# Allegro board AD201MPCHVVA_VER_A_Allegro.brd
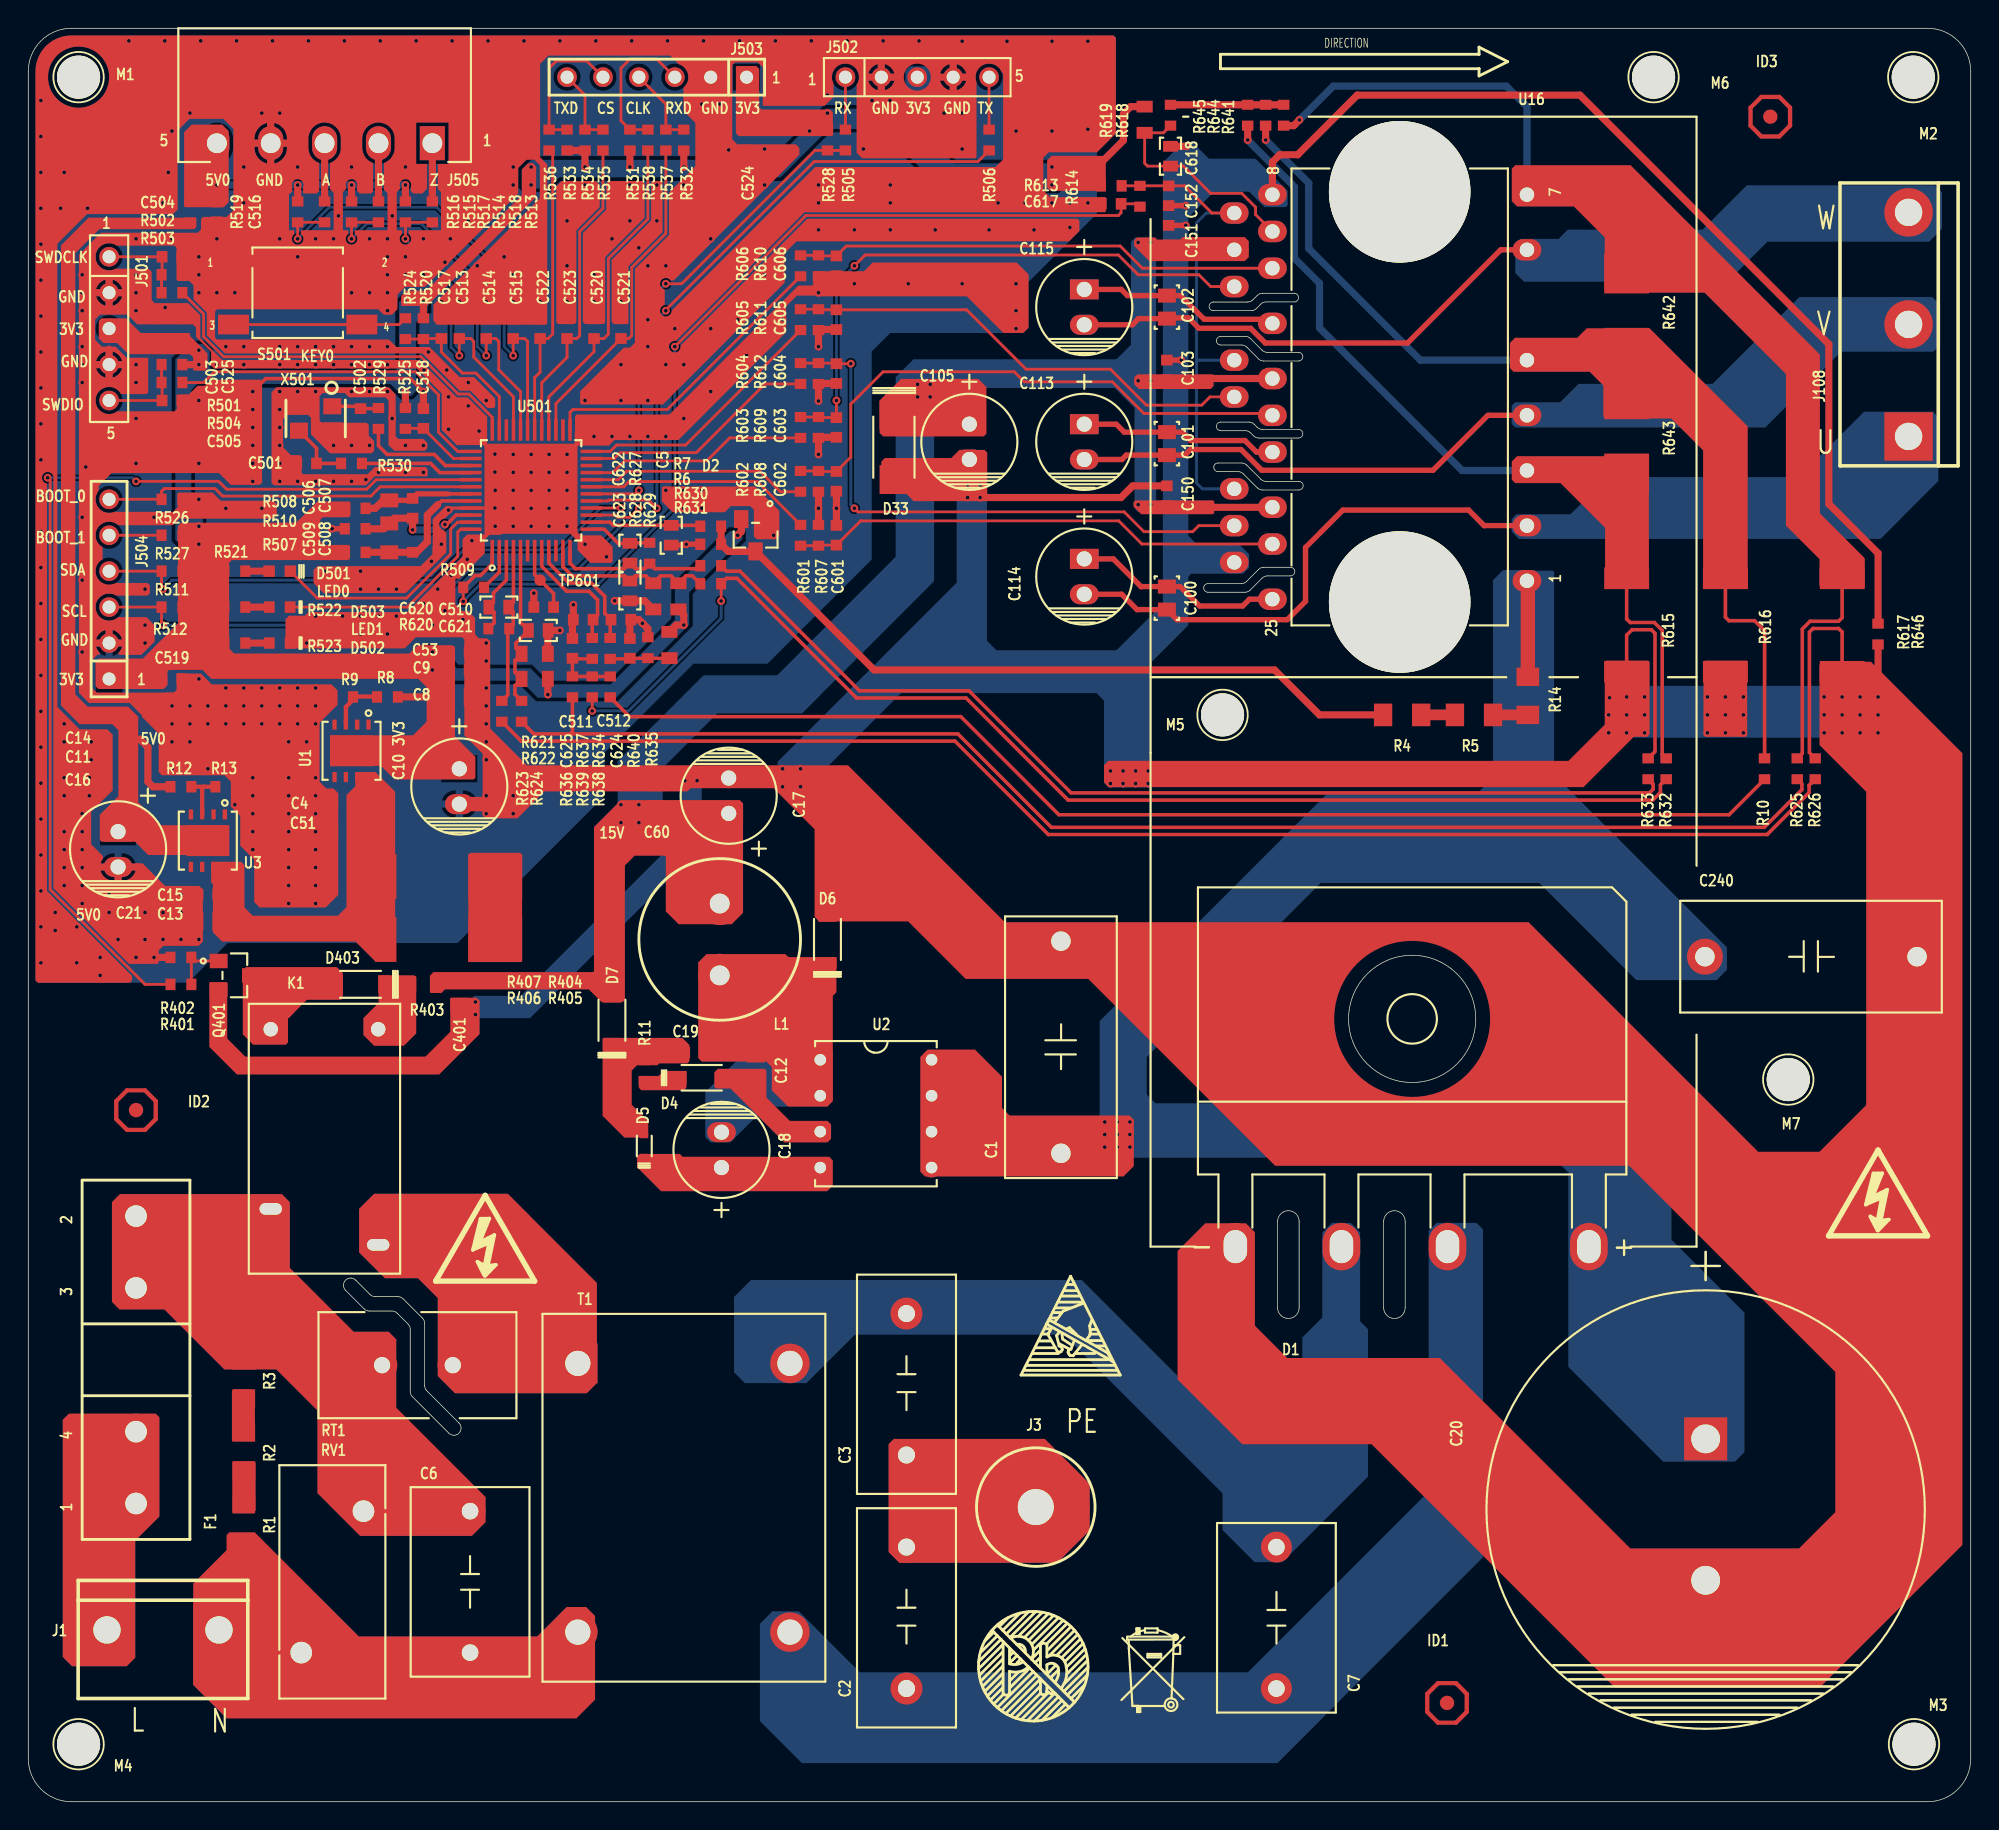
[diagram p0: board, top side]
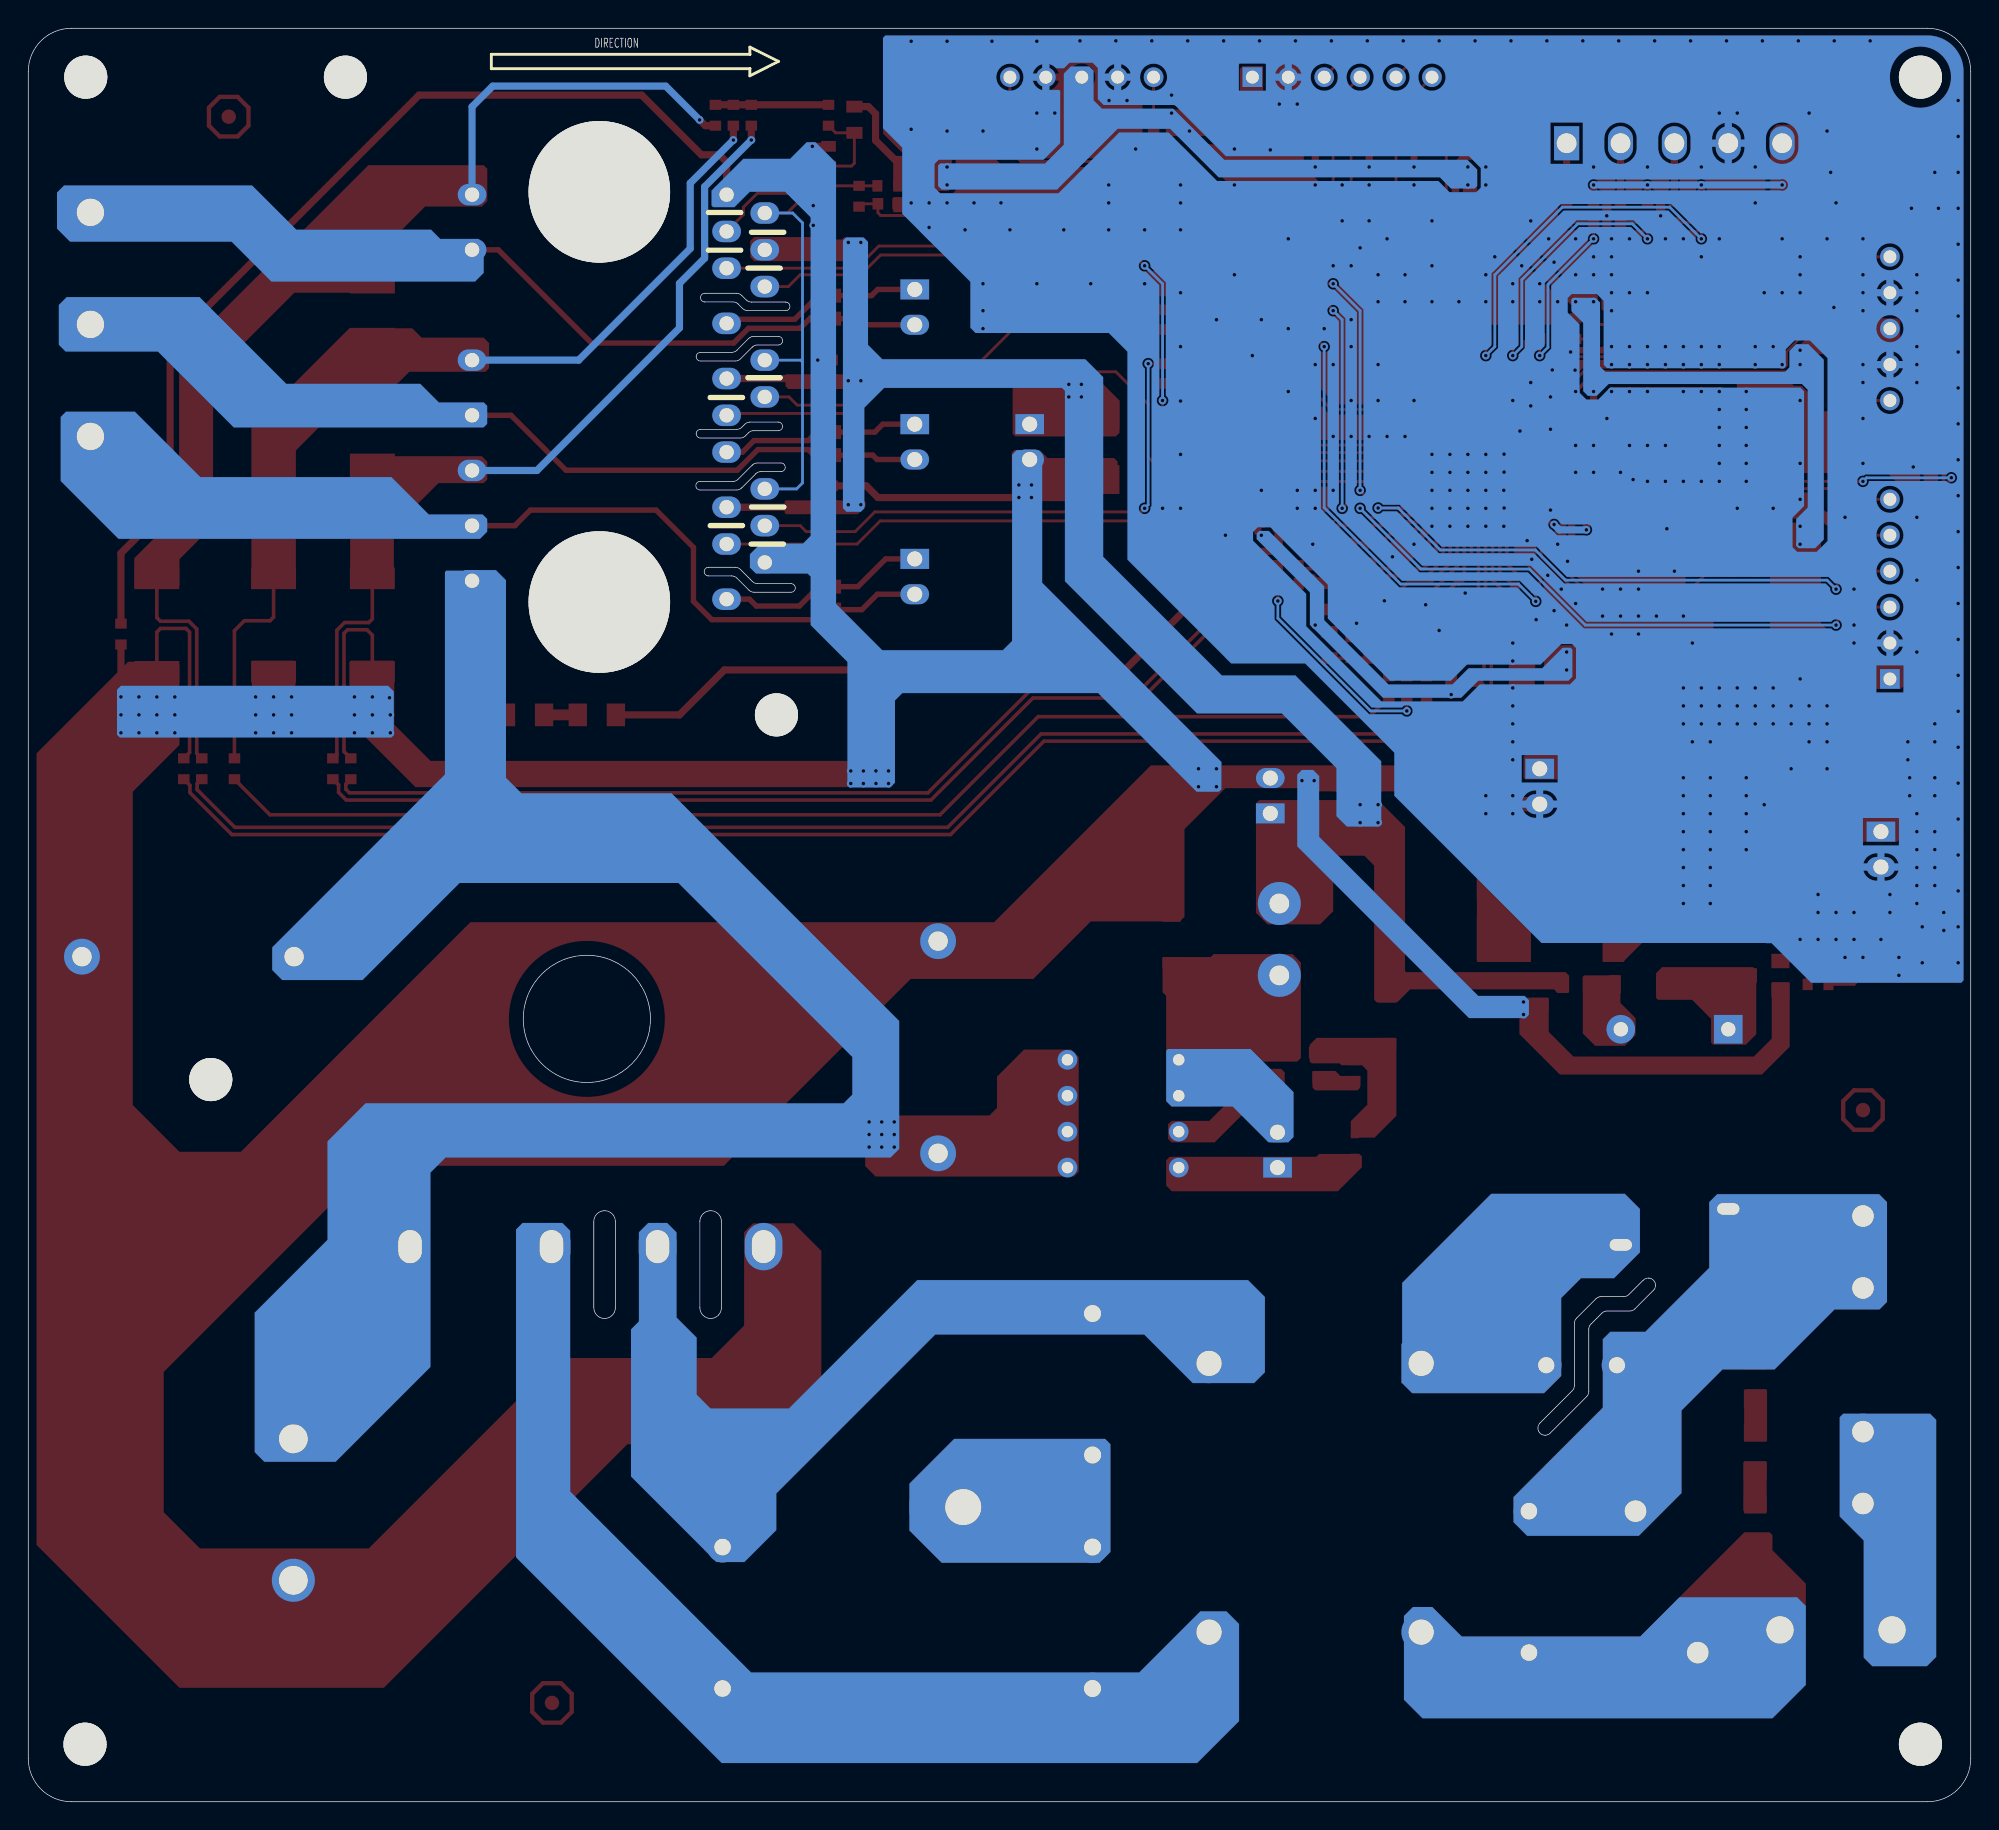
[diagram p1: board, bottom side, seen from below]

Outline 137.36 x 125.37 mm; copper layers: TOP, BOTTOM. Coordinates in mm from the lower left corner of the outline.
Outline path: circle c97.86,55.34 r4.5 ; 0,122.33 arc(0.89,124.48) 3.05,125.37 134.32,125.37 arc(136.47,124.48) 137.36,122.33 137.36,3.05 arc(136.47,0.89) 134.32,0 3.05,0 arc(0.89,0.89) 0,3.05 0,122.33 ; 22.29,36.51 arc(22.44,36.87) 22.8,37.02 arc(22.99,36.98) 23.16,36.87 24.17,35.85 arc(24.34,35.74) 24.53,35.71 26.14,35.71 arc(26.34,35.67) 26.5,35.56 27.88,34.18 arc(27.99,34.02) 28.03,33.82 28.03,29.42 arc(28.07,29.22) 28.18,29.06 30.46,26.78 arc(30.57,26.61) 30.61,26.42 arc(30.46,26.06) 30.1,25.91 arc(29.9,25.95) 29.74,26.06 27.16,28.64 arc(27.05,28.8) 27.01,29 27.01,33.4 arc(26.97,33.6) 26.86,33.76 26.08,34.54 arc(25.92,34.65) 25.72,34.69 24.11,34.69 arc(23.92,34.73) 23.75,34.84 22.44,36.15 arc(22.33,36.32) 22.29,36.51 ; 83.43,85.51 arc(83.12,85.81) 83.43,86.12 85.79,86.12 arc(85.99,86.15) 86.15,86.26 87.01,87.12 arc(87.17,87.23) 87.37,87.27 89.26,87.27 arc(89.56,86.96) 89.26,86.66 87.62,86.66 arc(87.42,86.62) 87.26,86.51 86.4,85.66 arc(86.24,85.54) 86.04,85.51 83.43,85.51 ; 83.81,105.41 arc(83.5,105.72) 83.81,106.02 86.23,106.02 arc(86.43,106.06) 86.59,106.17 86.91,106.49 arc(87.07,106.6) 87.27,106.64 89.52,106.64 arc(89.83,106.33) 89.52,106.03 87.52,106.03 arc(87.33,105.99) 87.16,105.88 86.84,105.56 arc(86.68,105.45) 86.48,105.41 83.81,105.41 ; 84.02,103.29 arc(84.11,103.5) 84.33,103.59 86.06,103.59 arc(86.25,103.56) 86.42,103.45 87.25,102.61 arc(87.42,102.5) 87.61,102.46 89.83,102.46 arc(90.04,102.37) 90.13,102.16 arc(90.04,101.94) 89.83,101.85 87.36,101.85 arc(87.16,101.89) 87,102 86.17,102.84 arc(86,102.95) 85.81,102.98 84.33,102.98 arc(84.11,103.07) 84.02,103.29 ; 84.02,97.23 arc(84.11,97.45) 84.33,97.54 86.33,97.54 arc(86.52,97.5) 86.69,97.39 86.91,97.17 arc(87.07,97.06) 87.26,97.02 89.83,97.02 arc(90.04,96.93) 90.13,96.71 arc(90.04,96.5) 89.83,96.41 87.01,96.41 arc(86.82,96.45) 86.65,96.56 86.43,96.78 arc(86.27,96.89) 86.07,96.93 84.33,96.93 arc(84.11,97.02) 84.02,97.23 ; 84.14,94.03 arc(83.83,94.34) 84.14,94.64 85.81,94.64 arc(86,94.6) 86.17,94.49 87.17,93.49 arc(87.33,93.38) 87.53,93.34 89.85,93.34 arc(90.16,93.04) 89.85,92.73 87.27,92.73 arc(87.08,92.77) 86.91,92.88 85.91,93.88 arc(85.75,93.99) 85.55,94.03 84.14,94.03 ; 88.35,41.02 arc(89.11,41.78) 89.87,41.02 89.87,34.92 arc(89.11,34.16) 88.35,34.92 88.35,41.02 ; 95.85,41.02 arc(96.61,41.78) 97.37,41.02 97.37,34.92 arc(96.61,34.16) 95.85,34.92 95.85,41.02

## Design rules (mm)
net group IPM_W: nets IPM_W VB_W_C
net group 3W: nets APT0_A APT0_B APT1_A APT1_B APT2_B
net group GND: nets GND

## Placement (name value [footprint] x y rotation side)
C1  100nF  [CAP2-591X]  73.03 45.84 90 top
C2  4.7nF  [CAP2-394L]  62.1 8 90 top
C3  4.7nF  [CAP2-394L]  62.1 24.51 90 top
C4  100nF  [SC0603-TC]  22.23 70.48 180 top
C5  1nF  [SC0603-PA]  45.47 89.53 270 top
C6  220nF  [CAP2-394M]  31.24 10.54 90 top
C7  220nF  [CAP2-394M]  88.27 8 90 top
C8  10uF  [SC0805-TD]  30.48 78.11 180 top
C9  100nF  [SC0603-TC]  30.48 80.01 180 top
C10  100uF  [CAPC2-98-248A]  30.48 73.03 270 top
C11  100nF  [SC0603-TC]  6.2 73.84 0 top
C12  22nF  [SC0805-TD]  51.44 51.94 270 top
C13  10uF  [SC0805-TD]  12.7 62.23 180 top
C14  100nF  [SC0603-TC]  6.2 75.11 0 top
C15  100nF  [SC0603-TC]  12.7 64.14 180 top
C16  10uF  [SC0805-TD]  6.17 72.21 0 top
C17  100uF  [CAPC2-98-248A]  49.53 69.87 90 top
C18  10uF  [CAPC2-98-248A]  49.02 44.83 90 top
C19  100nF  [SC0603-TC]  47.12 52.96 180 top
C20  470uF  [CAPC2-394-1181A]  118.62 25.65 270 top
C21  100uF  [CAPC2-98-248A]  6.35 68.58 270 top
C51  10uF  [SC0805-TD]  22.23 68.58 180 top
C53  100nF  [SC0603-TC]  30.48 81.28 180 top
C60  10uF  [SC0805-TD]  44.45 71.12 90 top
C100  100nF  [SC0805B]  80.52 85.09 270 top
C101  100nF  [SC0805B]  80.52 96.01 270 top
C102  100nF  [SC0805B]  80.52 105.66 270 top
C103  100nF  [SC0603-TC]  80.52 101.22 270 top
C105  100uF  [CAPC2-98-248A]  66.55 97.39 270 top
C113  10uF  [CAPC2-98-248A]  74.68 97.39 270 top
C114  10uF  [CAPC2-98-248A]  74.68 87.86 270 top
C115  10uF  [CAPC2-98-248A]  74.68 106.91 270 top
C150  100nF  [SC0603-TC]  80.52 92.33 270 top
C151  100nF  [SC0603-TC]  80.64 110.74 270 top
C152  10nF/NC  [SC0603-TC]  80.64 113.54 90 top
C240  100nF/NC  [CAP2-591X]  118.57 59.74 0 top
C401  10uF  [SC0805-TD]  30.48 57.15 270 top
C501  18pF  [SC0603-TB]  19.68 94.61 0 top
C502  18pF  [SC0603-TB]  23.5 97.79 90 top
C503  100nF  [SC0603-TC]  8.89 104.14 90 top
C504  18pF  [SC0603-TB]  10.16 109.22 180 top
C505  18pF  [SC0603-TB]  10.16 99.06 180 top
C506  10uF  [SC0805-TD]  25.53 91.19 270 top
C507  100nF  [SC0603-TC]  27.18 91.44 270 top
C508  100nF  [SC0603-TC]  27.18 87.63 270 top
C509  10uF  [SC0805-TD]  25.53 87.52 270 top
C510  100pF  [SC0603-TC]  36.45 84.45 0 top
C511  100pF  [SC0603-TC]  39.24 83.57 0 top
C512  100pF  [SC0603-TC]  41.91 83.57 180 top
C513  100pF  [SC0603-TC]  30.48 104.14 90 top
C514  100pF  [SC0603-TC]  32.38 104.14 90 top
C515  100pF  [SC0603-TC]  34.29 104.14 90 top
C516  100nF  [SC0603-TC]  13.34 112.39 90 top
C517  100nF  [SC0603-TC]  29.21 104.14 90 top
C518  100nF  [SC0603-TC]  27.94 97.79 90 top
C519  100nF  [SC0603-TC]  10.16 79.38 0 top
C520  100pF  [SC0603-TC]  40.01 104.14 90 top
C521  100pF  [SC0603-TC]  41.91 104.14 90 top
C522  100pF  [SC0603-TC]  36.2 104.14 90 top
C523  100pF  [SC0603-TC]  38.1 104.14 90 top
C524  100nF  [SC0603-TC]  50.8 117.47 90 top
C525  10uF  [SC0805-TD]  10.79 104.14 90 top
C601  100pF  [SC0603-TC]  57.15 89.53 90 top
C602  100pF  [SC0603-TC]  57.15 93.34 270 top
C603  100pF  [SC0603-TC]  57.15 97.16 270 top
C604  100pF  [SC0603-TC]  57.15 100.97 270 top
C605  100pF  [SC0603-TC]  57.15 104.78 270 top
C606  100pF  [SC0603-TC]  57.15 108.58 270 top
C617  10nF  [SC0603-TC]  76.58 112.97 0 top
C618  1nF  [SC0603-PA]  80.77 116.33 90 top
C620  47pF  [SC0603-PA]  33.27 84.45 180 top
C621  47pF  [SC0603-PA]  36.07 82.8 180 top
C622  47pF  [SC0603-PA]  42.55 88.27 90 top
C623  47pF  [SC0603-PA]  42.55 85.6 90 top
C624  100pF  [SC0603-TC]  42.55 81.53 90 top
C625  100pF  [SC0603-TC]  38.48 81.53 90 top
D1  BRIDGE4  [DIODE4-295-65-DOWN-BACK]  110.36 39.24 180 top
D2  D2-3_A  [SOT23]  51.44 89.53 180 top
D4  DZ_A  [HSOD123A]  47.62 51.18 180 top
D5  D_A  [SD0503A]  43.56 46.35 270 top
D6  D_A  [SD1107H]  56.52 60.96 270 top
D7  D_A  [SD1107H]  41.27 55.24 270 top
D33  1N5231BRL  [SD1714C]  61.21 95.76 90 top
D403  D_A  [SD1107H]  23.5 57.78 0 top
D501  LED  [SD0603-LED-A]  17.78 87 0 top
D502  LED  [HSD0603-LED]  17.78 81.92 0 top
D503  LED  [HSD0603-LED]  17.78 84.45 0 top
F1  FUSE-SMD5A  [FUSE4-200A]  7.62 31.24 90 top
ID1  PCB-MARKPOINT  [ID-BOARD]  100.33 6.99 0 top
ID2  PCB-MARKPOINT  [ID-BOARD]  7.62 48.9 0 top
ID3  PCB-MARKPOINT  [ID-BOARD]  123.19 119.13 0 top
J1  SIP2  [SIP-2P-312]  9.53 12.14 180 top
J3  *  [PWC0101-M-A]  71.25 20.83 0 top
J108  *  [SIP-3P-312]  132.97 96.52 90 top
J501  WH254-05-230_126-G-S  [SIP-5P]  5.71 109.22 270 top
J502  WH254-05-230_126-G-S  [SIP-5P]  57.78 121.92 0 top
J503  WH254-06-230_126-G-S  [SIP-6P]  44.45 121.92 180 top
J504  WH254-06-230_126-G-S  [SIP-6P]  5.71 85.72 90 top
J505  NC  [TB5-150S-C]  28.57 117.25 180 top
K1  HF32FV-G_12-HSLTF  [RLY4-500-299B]  17.14 54.61 270 top
L1  1.5mH  [INDC2-200]  48.9 60.96 90 top
M1  1381028_none  [HOLE120]  3.56 121.92 0 top
M2  1381028_none  [HOLE120]  133.3 121.92 0 top
M3  1381028_none  [HOLE120]  133.35 4.06 0 top
M4  1381028_none  [HOLE120]  3.56 4.06 0 top
M5  1381028_none  [HOLE120]  84.45 76.83 0 top
M6  1381028_none  [HOLE120]  114.94 121.92 0 top
M7  1381028_none  [HOLE120]  124.46 51.05 0 top
NOREF  -  []  96.66 34.16 0 top
NOREF#2  -  []  94.46 123.03 0 top
NOREF#3  -  []  73.03 33.16 0 top
NOREF#4  -  []  32.31 36.8 0 top
NOREF#5  -  []  90.12 102.08 0 top
NOREF#6  -  []  89.77 106.16 0 top
NOREF#7  -  []  0 80.72 0 top
NOREF#8  -  []  90.06 96.52 0 top
NOREF#9  -  []  90.15 92.96 0 top
NOREF#10  -  []  55.64 0 90 top
NOREF#11  -  []  30.31 25.95 0 top
NOREF#12  -  []  89.55 86.87 0 top
NOREF#13  -  []  71.07 9.58 0 top
NOREF#14  -  []  130.81 40.01 0 top
NOREF#15  -  []  99.62 51.2 0 top
NOREF#16  -  []  89.59 34.34 0 top
NOREF#17  -  []  82.07 9.41 0 top
Q401  NPN-BEC  [SOT23]  14.61 58.42 270 top
R1  200k  [SR1206-TD]  15.24 19.68 90 top
R2  200k  [SR1206-TD]  15.24 24.77 90 top
R3  200k  [SR1206-TD]  15.24 29.84 90 top
R4  475k  [SR1206-TD]  97.16 76.83 180 top
R5  475k  [SR1206-TD]  102.23 76.83 180 top
R6  12k  [SR0603-TB]  48.26 88.9 0 top
R7  499  [SR0603-TB]  48.26 90.17 180 top
R8  300  [SR0603-TB]  25.4 78.11 0 top
R9  499  [SR0603-TB]  22.23 78.11 0 top
R10  0  [SR0603-TB]  122.78 73.03 270 top
R11  1.74k  [SR0603-TB]  43.56 51.69 90 top
R12  100  [SR0603-TB]  10.79 71.75 180 top
R13  300  [SR0603-TB]  13.97 71.75 180 top
R14  475k  [SR1206-TD]  106.05 78.18 270 top
R401  4.7k  [SR0603-TB]  10.79 57.78 180 top
R402  10k  [SR0603-TB]  10.79 59.69 0 top
R403  200  [SR0805-TB]  27.94 57.78 180 top
R404  8.2  [SR2512-TE]  37.47 65.41 180 top
R405  8.2  [SR2512-TE]  37.47 60.96 180 top
R406  8.2  [SR2512-TE]  28.57 60.96 180 top
R407  8.2  [SR2512-TE]  28.57 65.41 180 top
R501  4.7k  [SR0603-TB]  10.16 101.6 0 top
R502  1k  [SR0603-TB]  10.16 107.95 180 top
R503  100  [SR0603-TB]  10.16 106.68 180 top
R504  100  [SR0603-TB]  10.16 100.33 180 top
R505  100  [SR0603-TB]  57.78 117.47 270 top
R506  100  [SR0603-TB]  67.94 117.47 270 top
R507  0  [SR0603-TB]  23.11 88.33 0 top
R508  0  [SR0603-TB]  23.11 91.44 0 top
R509  0  [SR0603-TB]  31.5 85.85 180 top
R510  0  [SR0603-TB]  23.11 89.99 0 top
R511  4.7k  [SR0603-TB]  10.16 87 0 top
R512  4.7k  [SR0603-TB]  10.16 84.45 0 top
R513  33  [SR0603-TB]  28.57 112.39 90 top
R514  33  [SR0603-TB]  24.77 112.39 90 top
R515  33  [SR0603-TB]  20.95 112.39 90 top
R516  10k  [SR0603-TB]  19.05 112.39 90 top
R517  10k  [SR0603-TB]  22.86 112.39 90 top
R518  10k  [SR0603-TB]  26.67 112.39 90 top
R519  0  [SR0603-TB]  11.43 112.39 270 top
R520  10k  [SR0603]  27.94 104.14 90 top
R521  300  [SR0603-TB]  14.61 87 180 top
R522  300  [SR0603-TB]  14.61 84.45 180 top
R523  300  [SR0603-TB]  14.61 81.92 180 top
R524  100  [SR0603-TB]  26.67 104.14 270 top
R525  10k  [SR0603-TB]  26.67 97.79 90 top
R526  10k  [SR0603-TB]  10.16 92.08 0 top
R527  1k  [SR0603-TB]  10.16 89.53 180 top
R528  4.7k  [SR0603-TB]  56.52 117.47 90 top
R529  0*  [SR0603-TB]  24.77 97.79 270 top
R530  0*  [SR0603-TB]  22.86 94.61 0 top
R531  10k  [SR0603-TB]  42.55 117.47 270 top
R532  10k  [SR0603-TB]  46.35 117.47 270 top
R533  10k  [SR0603-TB]  38.1 117.47 270 top
R534  10k  [SR0603-TB]  39.37 117.47 270 top
R535  33  [SR0603-TB]  40.64 117.47 90 top
R536  33  [SR0603-TB]  36.83 117.47 90 top
R537  33  [SR0603-TB]  45.09 117.47 90 top
R538  33  [SR0603-TB]  43.81 117.47 90 top
R601  100  [SR0603-TB]  54.61 89.53 270 top
R602  100  [SR0603-TB]  54.61 93.34 90 top
R603  100  [SR0603-TB]  54.61 97.16 90 top
R604  100  [SR0603-TB]  54.61 100.97 90 top
R605  100  [SR0603-TB]  54.61 104.78 90 top
R606  100  [SR0603-TB]  54.61 108.58 90 top
R607  4.7k  [SR0603-TB]  55.88 89.53 270 top
R608  4.7k  [SR0603-TB]  55.88 93.34 90 top
R609  4.7k  [SR0603-TB]  55.88 97.16 90 top
R610  4.7k  [SR0603-TB]  55.88 108.58 90 top
R611  4.7k  [SR0603-TB]  55.88 104.78 90 top
R612  4.7k  [SR0603-TB]  55.88 100.97 90 top
R613  4.7k  [SR0603-TB]  76.58 114.24 180 top
R614  100  [SR0603-TB]  78.61 113.5 270 top
R615  50m  [SR2512-TE]  113.03 83.19 90 top
R616  50m  [SR2512-TE]  120.02 83.19 90 top
R617  50m  [SR2512-TE]  128.27 83.19 90 top
R618  1.5k  [SR0603-TB]  80.77 119.23 90 top
R619  20k  [SR0805-TB]  78.94 118.91 90 top
R620  10k  [SR0603-TB]  33.27 82.93 180 top
R621  20k  [SR0805-TB]  35.81 81.15 180 top
R622  20k  [SR0805-TB]  35.81 79.38 0 top
R623  3.3k  [SR0603-TB]  33.49 77.09 90 top
R624  3.3k  [SR0603-TB]  34.89 77.09 90 top
R625  0  [SR0603-TB]  125.09 73.03 270 top
R626  0  [SR0603-TB]  126.36 73.03 270 top
R627  10k  [SR0603-TB]  43.94 88.27 90 top
R628  20k  [SR0805-TB]  44.2 85.22 90 top
R629  20k  [SR0805-TB]  45.97 85.22 270 top
R630  3.3k  [SR0603-TB]  48.26 87.38 180 top
R631  3.3k  [SR0603-TB]  48.26 86.11 180 top
R632  0  [SR0603-TB]  115.82 73.03 270 top
R633  0  [SR0603-TB]  114.55 73.03 270 top
R634  100  [SR0603-TB]  41.15 81.53 90 top
R635  20k  [SR0805-TB]  45.34 81.78 270 top
R636  3.3k  [SR0603-TB]  38.48 78.82 90 top
R637  100  [SR0603-TB]  39.88 81.53 90 top
R638  3.3k  [SR0603-TB]  41.15 78.82 90 top
R639  3.3k  [SR0603-TB]  39.88 78.82 90 top
R640  680  [SR0603-TB]  43.81 81.58 90 top
R641  3.3k  [SR0603-TB]  88.77 119.23 270 top
R642  1m*  [SR2512B-TF]  113.03 105.41 270 top
R643  1m*  [SR2512B-TF]  113.03 96.52 270 top
R644  3.3k  [SR0603-TB]  87.5 119.23 270 top
R645  3.3k  [SR0603-TB]  86.23 119.23 270 top
R646  0*  [SR0603-TB]  130.81 82.55 90 top
RT1  50  [RES2-197AF]  25.02 30.86 0 top
RV1  B72214U2381J903V87  [RES2-394AL]  19.3 10.54 90 top
S501  TC-108  [STSW4-T-U]  19.05 106.68 0 top
T1  LB21H12385R  [INDC4-591W]  38.86 30.99 270 top
TP601  TESTPOINT-HOLE  [TP32-SMD]  36.2 86.36 0 top
U1  LD1086PUR  [MLF8C-080-0404L]  22.86 74.3 180 top
U2  Viper12a  [DIP8-100-250]  59.94 48.64 270 top
U3  LD1086PUR  [MLF8C-080-0404L]  12.7 67.94 180 top
U16  IPM  [DIP25-51-591]  105.98 86.31 90 top
U501  D048-SW1-A  [QFP48D-050-0707L]  35.56 92.71 0 top
X501  12MHz  [SX4-0302]  20.32 97.79 180 top

## Library data of the parts
C1 C240 = CAP2-591X
C2 C3 = CAP2-394L
C4 C9 C11 C14 C15 C19 C53 C103 C150-C152 C503 C507 C508 C510-C524 C601-C606 C617 C624 C625 = SC0603-TC
C5 C618 C620-C623 = SC0603-PA
C6 C7 = CAP2-394M
C8 C12 C13 C16 C51 C60 C401 C506 C509 C525 = SC0805-TD
C10 C17 C18 C21 C105 C113-C115 = CAPC2-98-248A
C20 = CAPC2-394-1181A
C100 C101 = SC0805B
C102 = SC0805B: signal model: SC0402_1PF/NC*
C501 C502 C504 C505 = SC0603-TB
D1 = DIODE4-295-65-DOWN-BACK
D2 Q401 = SOT23
D4 = HSOD123A
D5 = SD0503A
D6 D7 D403 = SD1107H
D33 = SD1714C
D501 = SD0603-LED-A
D502 D503 = HSD0603-LED
F1 = FUSE4-200A
ID1-ID3 = ID-BOARD
J1 = SIP-2P-312
J3 = PWC0101-M-A
J108 = SIP-3P-312
J501 J502 = SIP-5P
J503 J504 = SIP-6P
J505 = TB5-150S-C
K1 = RLY4-500-299B
L1 = INDC2-200
M1-M7 = HOLE120
R1-R5 R14 = SR1206-TD
R6-R13 R401 R402 R501-R519 R521-R538 R601-R614 R618 R620 R623-R627 R630-R634 R636-R641 R644-R646 = SR0603-TB
R403 R619 R621 R622 R628 R629 R635 = SR0805-TB
R404-R407 R615-R617 = SR2512-TE
R520 = SR0603
R642 R643 = SR2512B-TF
RT1 = RES2-197AF
RV1 = RES2-394AL
S501 = STSW4-T-U
T1 = INDC4-591W
TP601 = TP32-SMD
U1 U3 = MLF8C-080-0404L
U2 = DIP8-100-250
U16 = DIP25-51-591
U501 = QFP48D-050-0707L
X501 = SX4-0302

## Footprints (pads in the part's own frame, mm; a bottom-side part is the same pattern mirrored in y, then rotated)
CAP2-394L
  round 2.261 hole 1.2: 1(0,0) 2(10,0)
CAP2-394M
  round 2.184 hole 1.168: 1(0,0) 2(10,0)
CAP2-591X
  round 2.54 hole 1.372: 1(0,0) 2(15,0)
CAPC2-98-248A
  rect 1.422x2.032 hole 1.067: 1(0,0)
  oval 1.422x2.032 hole 1.067: 2(2.5,0)
CAPC2-394-1181A
  rect 3.048x3.048 hole 2.032: 1(0,0)
  round 3.048 hole 2.032: 2(10,0)
DIODE4-295-65-DOWN-BACK
  oval 2.667x3.353 hole 1.651x2.337: 1(0,0) 2(10,0) 3(17.5,0) 4(25,0)
DIP8-100-250
  rect 1.397x1.397 hole 0.813: 1(-3.81,-3.935)
  round 1.397 hole 0.813: 2(-1.27,-3.935) 3(1.27,-3.935) 4(3.81,-3.935) 5(3.81,3.935) 6(1.27,3.935) 7(-1.27,3.935) 8(-3.81,3.935)
DIP25-51-591
  round 10.008 hole 10.008 unplated: (-1.5,9) (27.5,9)
  oval 1.524x2.032 hole 1.016: 1(0,0) 2(3.9,0) 3(7.8,0) 4(11.7,0) 5(15.6,0) 6(23.4,0) 7(27.3,0) 8(27.3,18) 9(26,20.7) 10(24.7,18) 11(23.4,20.7) 12(22.1,18) 13(20.8,20.7) 14(18.2,18) 15(15.6,20.7) 16(14.3,18) 17(13,20.7) 18(11.7,18) 19(9.1,18) 20(6.5,20.7) 21(5.2,18) 22(3.9,20.7) 23(2.6,18) 24(1.3,20.7) 25(-1.3,18)
FUSE4-200A
  rect 2.54x2.54 hole 1.524: 1(-10.16,0)
  round 2.54 hole 1.524: 2(10.16,0) 3(5.08,0) 4(-5.08,0)
HOLE120
  round 3.048 hole 3.048 unplated: (0,0)
HSD0603-LED
  rect 0.762x0.813 smd: 1(-0.737,0) 2(0.737,0)
HSOD123A
  rect 1.219x0.914 smd: 1(1.676,0) 2(-1.676,0)
ID-BOARD
  round 1.016 smd: 1(0,0)
INDC2-200
  round 3.048 hole 1.397: 1(-2.54,0) 2(2.54,0)
INDC4-591W
  rect 2.794x2.794 hole 1.778: 1(0,0)
  round 2.794 hole 1.778: 2(19,0) 3(19,15) 4(0,15)
MLF8C-080-0404L
  rect 0.305x0.711 smd: 1(-1.2,-1.854) 2(-0.4,-1.854) 3(0.4,-1.854) 4(1.2,-1.854) 5(1.2,1.854) 6(0.4,1.854) 7(-0.4,1.854) 8(-1.2,1.854)
  rect 3.048x2.184 smd: 9(0,0)
PWC0101-M-A
  round 7.62 hole 2.54: 1(0,0)
QFP48D-050-0707L
  rect 0.254x1.524 smd: 1(-2.75,-4.262) 2(-2.25,-4.262) 3(-1.75,-4.262) 4(-1.25,-4.262) 5(-0.75,-4.262) 6(-0.25,-4.262) 7(0.25,-4.262) 8(0.75,-4.262) 9(1.25,-4.262) 10(1.75,-4.262) 11(2.25,-4.262) 12(2.75,-4.262) 25(2.75,4.262) 26(2.25,4.262) 27(1.75,4.262) 28(1.25,4.262) 29(0.75,4.262) 30(0.25,4.262) 31(-0.25,4.262) 32(-0.75,4.262) 33(-1.25,4.262) 34(-1.75,4.262) 35(-2.25,4.262) 36(-2.75,4.262)
  rect 1.524x0.254 smd: 13(4.262,-2.75) 14(4.262,-2.25) 15(4.262,-1.75) 16(4.262,-1.25) 17(4.262,-0.75) 18(4.262,-0.25) 19(4.262,0.25) 20(4.262,0.75) 21(4.262,1.25) 22(4.262,1.75) 23(4.262,2.25) 24(4.262,2.75) 37(-4.262,2.75) 38(-4.262,2.25) 39(-4.262,1.75) 40(-4.262,1.25) 41(-4.262,0.75) 42(-4.262,0.25) 43(-4.262,-0.25) 44(-4.262,-0.75) 45(-4.262,-1.25) 46(-4.262,-1.75) 47(-4.262,-2.25) 48(-4.262,-2.75)
RES2-197AF
  round 2.159 hole 1.143: 1(0,0) 2(5,0)
RES2-394AL
  round 2.54 hole 1.524: 1(0,0) 2(10,-4.4)
RLY4-500-299B
  rect 2.032x2.032 hole 1.016: 1(0,0)
  round 2.032 hole 1.016: 2(0,7.6)
  oval 1.829x2.591 hole 0.813x1.575: 3(12.7,0) 4(15.24,7.6)
SC0603-PA
  rect 0.762x1.041 smd: 1(-0.699,0) 2(0.699,0)
SC0603-TB
  rect 0.762x0.813 smd: 1(-0.699,0) 2(0.699,0)
SC0603-TC
  rect 0.762x0.813 smd: 1(-0.699,0) 2(0.699,0)
SC0805-TD
  rect 0.991x1.27 smd: 1(-0.813,0) 2(0.813,0)
SC0805B
  rect 0.991x1.27 smd: 1(-0.813,0) 2(0.813,0)
SD0503A
  rect 0.406x0.559 smd: 1(0.753,0) 2(-0.753,0)
SD0603-LED-A
  rect 0.813x0.813 smd: 1(-0.75,0) 2(0.75,0)
SD1107H
  rect 0.838x1.295 smd: 1(1.664,0) 2(-1.664,0)
SD1714C
  rect 2.032x2.032 smd: 1(-2.286,0) 2(2.286,0)
SIP-2P-312
  rect 3.429x3.429 hole 1.93: 1(-3.96,0)
  round 3.429 hole 1.93: 2(3.96,0)
SIP-3P-312
  rect 3.429x3.429 hole 1.93: 1(0,0)
  round 3.429 hole 1.93: 2(7.92,0) 3(15.84,0)
SIP-5P
  round 1.397 hole 0.914: 1(0,0) 2(2.54,0) 3(5.08,0) 4(7.62,0) 5(10.16,0)
SIP-6P
  rect 1.397x1.397 hole 0.914: 1(-6.35,0)
  round 1.397 hole 0.914: 2(-3.81,0) 3(-1.27,0) 4(1.27,0) 5(3.81,0) 6(6.35,0)
SOT23
  rect 1.016x1.27 smd: 1(-1.016,-1.143) 2(1.016,-1.143) 3(0,1.143)
SR0603
  rect 0.711x0.813 smd: 1(-0.737,0) 2(0.737,0)
SR0603-TB
  rect 0.711x0.813 smd: 1(-0.737,0) 2(0.737,0)
SR0805-TB
  rect 0.838x1.143 smd: 1(-0.927,0) 2(0.927,0)
SR1206-TD
  rect 1.295x1.6 smd: 1(-1.346,0) 2(1.346,0)
SR2512-TE
  rect 1.524x3.175 smd: 1(-3.302,0) 2(3.302,0)
SR2512B-TF
  rect 2.845x3.175 smd: 1(-2.64,0) 2(2.64,0)
STSW4-T-U
  rect 2.184x1.397 smd: 1(-4.537,2.25) 2(4.537,2.25) 3(-4.537,-2.25) 4(4.537,-2.25)
SX4-0302
  rect 1.27x1.143 smd: 1(-1.176,-0.864) 2(1.176,-0.864) 3(1.176,0.864) 4(-1.176,0.864)
TB5-150S-C
  rect 1.778x2.413 hole 1.397: 1(0,0)
  oval 1.778x2.413 hole 1.397: 2(3.81,0) 3(7.62,0) 4(11.43,0) 5(15.24,0)
TP32-SMD
  round 0.813 smd: 1(0,0)

## Nets
3V3: C8.2 C9.2 C10.1 C53.2 C503.1 C519.1 C524.2 C525.1 D2.2 J501.3 J502.3 J503.1(TP-1) J504.1(TP-1) R8.2 R501.2 R507.1 R508.1 R511.2 R512.2 R520.2 R521.2 R522.2 R523.2 R525.2 R527.1 R528.2 R531.2 R532.2 R533.2 R534.2 R613.2 R619.2 R622.2 R629.2 R635.1 U1.9
5V0: C11.2 C14.2 C16.2 C21.1 R12.2 R519.2 U3.9
15V: C17.1 C60.1 C103.2 C105.1 C150.2 C151.2 C401.1 D7.2 D33.2 L1.2(TP-2) R403.1 R404.1 R405.1 U16.11 U16.16 U16.21
AVDD33_ADC: C508.1 C509.1 R507.2 U501.44
DVDD33_1: C506.1 C507.1 R508.2 U501.43
GND: C1.2 C4.2 C5.2 C8.1 C9.1 C10.2 C11.1 C13.2 C14.1 C15.2 C16.1 C17.2 C20.2 C21.2 C51.2 C53.1 C60.2 C103.1 C105.2 C150.1 C151.1 C152.1 C240.2 C401.2 C501.1 C502.1 C503.2 C504.1 C505.1 C508.2 C509.2 C510.1 C511.1 C512.1 C513.2 C514.2 C515.2 C516.1 C517.2 C518.2 C519.2 C520.2 C521.2 C522.2 C523.2 C524.1 C525.2 C601.2 C602.2 C603.2 C604.2 C605.2 C606.2 C617.1 C618.2 C621.1 C623.1 C624.2 C625.2 D1.4 D2.1 D6.2 D33.1 D502.2 J501.2 J501.4 J502.2 J502.4 J503.2(TP-2) J504.2(TP-2) J505.4 Q401.2 R6.1 R9.1 R13.1 R402.1 R502.1 R510.1 R526.2 R607.1 R608.1 R609.1 R610.1 R611.1 R612.1 R615.1 R616.1 R617.1 R621.1 R626.1 R628.1 R633.1 R640.2 R646.1 R646.2 S501.1 S501.2 U16.8 U16.24 U501.45 X501.2(TP-2) X501.4(TP-4)
A: J505.3 R515.2
ACMP1IN_N3: C511.2 R637.2 U501.8
ACMP1IN_P3: C512.2 R634.2 U501.9
ACMP1OUT: C510.2 TP601.1 U501.7
APT0_A: R601.1 U501.19
APT0_B: R604.1 U501.23
APT1_A: R602.1 U501.20
APT1_B: R605.1 U501.24
APT2_A: R603.1 U501.21
APT2_B: R606.1 U501.25
B: J505.2 R514.2
BOOT: J504.6(TP-6) R526.1 U501.42
BUS: C1.1 C20.1 C240.1 D1.1 R14.1 U2.5 U2.6 U2.7 U2.8 U16.1
BUS_V_SAMP: C5.1 R7.2 U501.14
CAPM0_QDMZ: C513.1 R513.1 R518.1 U501.33
CAPM1_QDMB: C514.1 R514.1 R517.1 U501.32
CAPM2_QDMA: C515.1 R515.1 R516.1 U501.31
E: C2.2 C3.1 J3.1(TP-1)
HIN_U_C: C601.1 R601.2 R607.2 U16.23
HIN_V_C: C602.1 R602.2 R608.2 U16.18
HIN_W_C: C603.1 R603.2 R609.2 U16.13
I2C0_SCL: J504.3(TP-3) R512.1 U501.15
I2C0_SDA: J504.4(TP-4) R511.1 U501.16
IPM_CSC: C618.1 R618.1 R619.1 U16.10
IPM_I: C625.1 R636.2 R637.1 R638.2 R639.2
IPM_NU: R615.2 R632.1 R643.2 R645.2 U16.3
IPM_NU_1: R631.1 R632.2 R639.1
IPM_NV: R10.1 R616.2 R642.2 R643.1 R644.2 U16.5
IPM_NV_1: R10.2 R638.1
IPM_NW: R617.2 R625.1 R641.2 R642.1 U16.7
IPM_NW_1: R624.1 R625.2 R636.1
IPM_U: C100.2 C114.2 J108.1(TP-1) U16.2
IPM_V: C101.2 C113.2 J108.2(TP-2) U16.4
IPM_VFO: C152.2 R613.1 R614.1 U16.9 U16.15 U16.20
IPM_W: C102.2 C115.2 J108.3(TP-3) U16.6
JTAG_TCK/SWDCLK: R503.1 U501.36
JTAG_TMS/SWDIO: R504.1 U501.37
KEY0: C517.1 R520.1 R524.2 U501.35
L: F1.1(TP-1) F1.4(TP-4) J1.2(TP-2)
LED0: D501.2 U501.47
LED1: D503.2 U501.48
LIN_U_C: C604.1 R604.2 R612.2 U16.22
LIN_V_C: C605.1 R605.2 R611.2 U16.17
LIN_W_C: C606.1 R606.2 R610.2 U16.12
N: C6.1 J1.1(TP-1) R1.1 RV1.1 T1.2
PGA0IN_N0: C620.1 R620.1 R623.2 U501.4
PGA0IN_P0: C621.2 R621.2 R622.1 R624.2 U501.5
PGA0OUT: C620.2 R620.2 U501.3
PGA1IN_N0: C622.1 R627.1 R630.2 U501.12
PGA1IN_P0: C623.2 R628.2 R629.1 R631.2 U501.11
PGA1OUT: C622.2 R627.2 U501.13
POE_ADC: C617.2 R509.2 R614.2 U501.1
PTC_IN: C6.2 F1.2(TP-2) F1.3(TP-3) K1.3 R3.2 RT1.1 RV1.2
PTC_OUT: K1.4 RT1.2 T1.1
PTC_RELAY: R401.2 U501.41
RESET: C518.1 R525.1 U501.38
SPI0_CLK: C521.1 R537.1 U501.27
SPI0_CS: C522.1 R536.1 U501.30
SPI0_RXD: C520.1 R538.1 U501.28
SPI0_TXD: C523.1 R535.1 U501.29
UART3_RX: R505.2 R528.1 U501.18
UART3_TX: R506.2 U501.17
VB_U_C: C100.1 C114.1 U16.25
VB_V_C: C101.1 C113.1 U16.19
VB_W_C: C102.1 C115.1 U16.14
XTAL_IN: R530.2 U501.40
XTAL_OUT: R529.2 U501.39
Z: J505.1 R513.2
$1N6939: R623.1 R626.2
$1N12806: R630.1 R633.2
$1N14808: C624.1 R634.1 R635.2 R640.1
$1N20473: R618.2 R641.1 R644.1 R645.1
$9N1662: Q401.1 R401.1 R402.2
$9N1671: D403.1 K1.2 R403.2
$9N1672: D403.2 K1.1 Q401.3
$9N4167: R2.2 R3.1
$9N4168: R1.2 R2.1
$9N4169: R4.1 R5.2
$9N4173: R5.1 R14.2
$9N4175: D2.3 R4.2 R6.2 R7.1
$9N4177: C12.1 C18.2 C19.1 D6.1 L1.1(TP-1) U2.1 U2.2
$9N4178: C12.2 D4.2 U2.3
$9N4179: C18.1 D5.1 U2.4
$9N4180: D4.1 R11.1
$9N4181: C19.2 D5.2 D7.1 R11.2
$9N4185: C2.1 C7.1 D1.2 T1.3
$9N4195: R8.1 R9.2 U1.3
$9N6236: C3.2 C7.2 D1.3 T1.4
$9N10787: R12.1 R13.2 U3.3
$9N14251: C4.1 C13.1 C15.1 C51.1 R406.2 R407.2 U1.7 U1.8 U3.7 U3.8
$9N14976: R404.2 R405.2 R406.1 R407.1
$10N6803: C502.2 R529.1 X501.1(TP-1)
$10N6848: C505.2 J501.5 R501.1 R504.2
$10N6869: C504.2 J501.1 R502.2 R503.2
$10N6873: C501.2 R530.1 X501.3(TP-3)
$10N10026: J502.1 R505.1
$10N10027: J502.5 R506.1
$10N10077: C506.2 C507.2 R510.2 U501.46
$10N13362: C516.2 J505.5 R516.2 R517.2 R518.2 R519.1
$10N14425: D502.1 R523.1
$10N14426: D501.1 R521.1
$10N14427: D503.1 R522.1
$10N14428: R524.1 S501.3 S501.4
$10N42642: J503.6(TP-6) R534.1 R535.2
$10N42643: J503.4(TP-4) R532.1 R537.2
$10N42644: J503.5(TP-5) R533.1 R536.2
$10N42647: J503.3(TP-3) R531.1 R538.2
$10N48085: J504.5(TP-5) R527.2
$10N52800: R509.1 U501.2

Pads without a net: ID1 1; ID2 1; ID3 1; U1 1 2 4 5 6; U3 1 2 4 5 6; U501 6 10 22 26 34

## Via types
v1: diameter 0.559, hole 0.254, TOP to BOTTOM, 572 vias

## Routing (per net, layer and track width the routed paths; a pad name or vN(x,y) marks a point on that pad's centre or on a via; arc(x,y) is an arc through that point)
3V3: length 21.5
  TOP w0.508: R635.1 45.82,83.19 v1(46.35,83.19) 46.35,83.91 R629.2 ; v1(12.06,101.6) R501.2 ; R533.2 R534.2 v1(39.37,115.57) ; R531.2 v1(42.55,115.57) ; R8.2 28.63,78.11 ; R525.2 v1(26.67,99.69) ; v1(50.16,89.53) 50.42,89.79 D2.2 ; v1(27.94,106.05) R520.2 ; R532.2 v1(46.35,115.57) ; R619.2 77.95,119.84 77.44,119.33 77.44,117.45 75.82,115.82 ; R622.2 v1(36.74,78.27)
  vias: v1(12.06,102.62) v1(12.06,90.17) v1(12.06,88.9) v1(26.67,106.05) v1(28.57,81.28) v1(28.57,80.01) v1(35.56,115.57) v1(35.56,114.3) v1(55.24,118.11) v1(56.52,119.38) v1(72.39,115.57) v1(72.39,114.3)
5V0: length 6
  TOP w0.508: C14.2 7.9,75.11 8.46,74.55 8.46,72.11 8.81,71.75 R12.2
15V: length 9.1
  TOP w0.508: 83.59,100.61 U16.16 ; 83.31,91.51 U16.21
  vias: v1(41.91,70.48) v1(41.91,69.22) v1(43.18,70.48) v1(43.18,69.22) v1(62.89,100.2) v1(62.89,99.31) v1(63.78,100.2) v1(63.78,99.31) v1(78.49,110.24) v1(78.49,100.46) v1(78.49,91.69) v1(79.38,110.24) v1(79.38,100.46) v1(79.38,91.69)
AVDD33_ADC: length 10.1
  TOP w0.254: 28.96,91.69 29.22,91.96 U501.44
  TOP w0.508: 28.96,91.69 28.22,90.96 28.22,89.08 27.47,88.33 C508.1 C509.1 R507.2
DVDD33_1: length 7.9
  TOP w0.254: 29.67,92.46 U501.43
  TOP w0.381: 29.67,92.46 27.5,92.46 C507.1 27.04,92 25.91,92
  TOP w0.508: R508.2 24.54,91.44 25.1,92 C506.1 25.91,92
GND: length 236.9
  TOP w0.254: R626.1 125.96,74.17 125.96,82.69 126.21,82.95 128.02,82.95 128.27,82.69 R617.1 ; v1(27.94,99.69) 27.03,100.61 16.79,100.61 v1(15.88,99.69) ; R633.1 115.04,74.24 115.04,82.6 114.78,82.85 113.41,82.85 113.03,82.47 R615.1
  TOP w0.381: C103.1 v1(81.53,101.92) ; v1(21.49,89.99) R510.1 ; C151.1 v1(81.85,111.44) ; C5.2 46.46,88.84 v1(46.53,88.9) R6.1 ; C152.1 v1(81.85,112.84)
  TOP w0.508: J501.2 4.64,106.68 ; J501.2 5.71,105.6 ; J501.2 5.71,107.76 ; J501.2 6.79,106.68 ; C605.2 55.92,104.08 R611.1 v1(55.88,102.87) ; v1(38.54,84.62) C511.1 38.48,83.5 C625.2 ; v1(37.59,82.8) C621.1 36.74,82.78 R621.1 ; C518.2 v1(27.94,99.69) ; v1(81.92,117.03) C618.2 ; C601.2 v1(57.15,91.44) C602.2 ; 66.48,121.92 J502.4 ; J502.4 65.41,123 ; J502.4 64.33,121.92 ; J502.4 65.41,120.84 ; J502.2 60.33,123 ; J502.2 60.33,120.84 ; J502.2 59.25,121.92 ; J502.2 61.4,121.92 ; J505.4 18.41,117.25 ; J505.4 17.14,115.66 ; J505.4 15.88,117.25 ; J505.4 17.14,118.84 ; C21.2 7.75,66.08 ; C21.2 4.95,66.08 ; C21.2 6.35,64.99 ; R608.1 v1(55.88,91.44) R607.1 ; v1(55.88,99.02) R612.1 55.92,100.27 C604.2 ; R628.1 43.59,84.9 C623.1 v1(41.47,84.9) ; R646.2 130.81,88.27 127.33,91.74 127.33,103.05 109.73,120.65 93.98,120.65 89.76,116.43 88.49,116.43 87.98,115.92 U16.8 ; v1(55.88,95.25) R609.1 55.92,96.46 C603.2 ; v1(67.31,92.2) 77.28,92.2 78.11,93.03 C150.1 ; 6.79,101.6 J501.4 ; J501.4 5.71,102.68 ; J501.4 4.64,101.6 ; J501.4 5.71,100.52 ; C510.1 v1(35.75,85.45) ; C624.2 42.55,83.5 C512.1 43.18,83.57 v1(43.43,83.31) 43.81,82.93 R640.2 ; 5.71,81.92 4.64,81.92 ; 5.71,81.92 5.71,82.99 ; 5.71,81.92 6.79,81.92 ; R402.1 v1(8.89,59.69) ; R646.1 130.81,79.38
  TOP w1.016: C10.2 33.14,70.52
  BOTTOM w0.508: J502.4 65.41,123 ; J502.4 65.41,120.84 ; J502.4 66.48,121.92 ; 17.14,115.66 J505.4 ; J505.4 15.88,117.25 ; J505.4 18.41,117.25 ; J505.4 17.14,118.84 ; 49.34,121.92 J503.2 ; J503.2 48.26,120.84 ; J503.2 47.18,121.92 ; J503.2 48.26,123 ; J502.2 60.33,120.84 ; J502.2 61.4,121.92 ; J502.2 59.25,121.92 ; J502.2 60.33,123 ; 6.79,106.68 J501.2 ; J501.2 5.71,107.76 ; J501.2 4.64,106.68 ; J501.2 5.71,105.6 ; 30.48,69.43 C10.2 ; C10.2 30.48,71.62 ; C10.2 29.08,70.52 ; C10.2 31.88,70.52 ; 6.35,67.17 C21.2 ; C21.2 6.35,64.99 ; C21.2 7.75,66.08 ; C21.2 4.95,66.08 ; J501.4 5.71,102.68 ; J501.4 4.64,101.6 ; J501.4 5.71,100.52 ; J501.4 6.79,101.6 ; 5.71,80.84 5.71,81.92 ; 5.71,81.92 5.71,82.99 ; 5.71,81.92 6.79,81.92 ; 5.71,81.92 4.64,81.92
  vias: v1(0.89,120.27) v1(0.89,117.73) v1(0.89,115.19) v1(0.89,112.65) v1(0.89,110.11) v1(0.89,107.57) v1(0.89,105.03) v1(0.89,102.49) v1(0.89,99.95) v1(0.89,97.41) v1(0.89,94.87) v1(0.89,92.33) v1(0.89,89.79) v1(0.89,87.25) v1(0.89,84.71) v1(0.89,82.17) v1(0.89,79.63) v1(0.89,77.09) v1(0.89,74.55) v1(0.89,72.01) v1(0.89,69.47) v1(0.89,66.93) v1(0.89,64.39) v1(0.89,61.85) v1(0.89,59.31) v1(1.91,62.87) v1(1.91,61.59) v1(2.29,112.65) v1(2.54,115.19) v1(2.54,76.2) v1(2.54,74.93) v1(2.54,72.39) v1(2.54,71.12) v1(2.54,68.58) v1(2.54,67.31) v1(2.54,66.04) v1(2.54,64.77) v1(3.43,61.85) v1(3.43,59.31) v1(3.81,107.95) v1(3.81,106.68) v1(3.81,105.41) v1(3.81,102.87) v1(3.81,101.6) v1(3.81,100.33) v1(3.81,90.81) v1(3.81,86.36) v1(3.81,81.28) v1(3.81,69.85) v1(3.81,68.58) v1(3.81,67.31) v1(3.81,66.04) v1(3.81,64.77) v1(3.81,63.5) v1(4.06,94.36) v1(4.19,112.65) v1(4.32,72.39) v1(4.32,71.12) v1(4.45,74.93) v1(4.45,73.66) v1(5.08,59.69) v1(5.08,58.42) v1(5.71,64.14) v1(5.71,62.87) v1(6.35,60.96) v1(7.11,124.49) v1(7.62,110.49) v1(7.62,107.95) v1(7.62,106.68) v1(7.62,105.41) v1(7.62,101.6) v1(7.62,100.33) v1(7.62,97.79) v1(7.62,94.61) v1(7.62,59.69) v1(8.26,85.72) v1(8.26,83.19) v1(8.26,81.92) v1(8.26,62.87) v1(8.26,60.96) v1(8.89,90.81) v1(9.53,113.03) v1(9.53,62.87) v1(9.53,60.96) v1(9.65,124.49) v1(9.68,105.64) v1(9.91,115.19) v1(10.16,118.11) v1(10.16,110.49) v1(10.16,77.47) v1(10.16,76.2) v1(10.16,74.93) v1(10.16,73.03) v1(10.79,64.14) v1(10.79,62.87) v1(10.79,60.96) v1(11.43,119.38) v1(11.43,77.47) v1(11.43,76.2) v1(11.43,74.93) v1(12.06,109.22) v1(12.06,107.95) v1(12.06,106.68) v1(12.06,99.06) v1(12.06,94.61) v1(12.06,92.08) v1(12.06,79.38) v1(12.06,60.96) v1(12.19,124.49) v1(12.7,77.47) v1(12.7,76.2) v1(12.7,73.03) v1(13.34,110.49) v1(13.34,106.68) v1(13.34,101.6) v1(13.97,102.87) v1(13.97,91.44) v1(13.97,78.74) v1(13.97,77.47) v1(13.97,76.2) v1(14.61,106.68) v1(14.61,70.48) v1(14.73,124.49) v1(15.24,115.57) v1(15.24,113.03) v1(15.24,102.87) v1(15.24,101.6) v1(15.24,78.74) v1(15.24,77.47) v1(15.24,76.2) v1(15.88,98.42) v1(15.88,97.16) v1(15.88,95.89) v1(15.88,94.61) v1(15.88,93.34) v1(15.88,72.39) v1(15.88,71.12) v1(15.88,69.85) v1(15.88,68.58) v1(15.88,67.31) v1(16.51,119.38) v1(16.51,91.44) v1(16.51,78.74) v1(16.51,77.47) v1(16.51,76.2) v1(17.27,124.49) v1(17.78,119.38) v1(17.78,110.49) v1(17.78,102.87) v1(17.78,101.6) v1(17.78,99.69) v1(17.78,98.42) v1(17.78,97.16) v1(17.78,95.89) v1(17.78,94.61) v1(17.78,93.34) v1(17.78,78.74) v1(17.78,77.47) v1(17.78,76.2) v1(18.41,74.93) v1(18.41,72.39) v1(18.41,71.12) v1(18.41,69.85) v1(18.41,68.58) v1(18.41,67.31) v1(18.41,66.04) v1(18.41,64.77) v1(18.41,63.5) v1(19.05,115.57) v1(19.05,109.22) v1(19.05,102.87) v1(19.05,101.6) v1(19.05,99.69) v1(19.05,93.34) v1(19.05,78.74) v1(19.05,77.47) v1(19.05,76.2) v1(19.68,81.92) v1(19.68,74.93) v1(19.81,124.49) v1(20.32,110.49) v1(20.32,102.87) v1(20.32,101.6) v1(20.32,99.69) v1(20.32,93.34) v1(20.32,83.82) v1(20.32,78.74) v1(20.32,77.47) v1(20.32,76.2) v1(20.32,72.39) v1(20.32,71.12) v1(20.32,69.85) v1(20.32,68.58) v1(20.32,67.31) v1(20.32,66.04) v1(20.32,64.77) v1(20.32,63.5) v1(20.95,87) v1(21.59,110.49) v1(21.59,102.87) v1(21.59,101.6) v1(21.59,95.89) v1(21.59,93.34) v1(21.93,112.12) v1(22.23,83.82) v1(22.35,124.49) v1(22.86,115.57) v1(22.86,106.68) v1(22.86,102.87) v1(22.86,101.6) v1(22.86,99.69) v1(22.86,95.89) v1(22.86,93.34) v1(23.5,87) v1(23.5,85.72) v1(23.5,83.82) v1(23.5,82.55) v1(23.88,93.47) v1(24.13,110.49) v1(24.13,106.68) v1(24.13,102.87) v1(24.13,101.6) v1(24.13,99.69) v1(24.13,95.89) v1(24.77,93.98) v1(24.77,85.72) v1(24.77,83.82) v1(24.89,124.49) v1(25.4,110.49) v1(25.4,109.22) v1(25.4,107.95) v1(25.4,106.68) v1(25.4,105.41) v1(25.4,102.87) v1(25.4,101.6) v1(25.4,99.69) v1(25.4,82.55) v1(25.74,112.12) v1(25.73,97.79) v1(26.04,85.72) v1(26.04,83.82) v1(26.67,115.57) v1(26.67,109.22) v1(26.67,107.95) v1(26.67,95.89) v1(26.67,93.98) v1(27.43,124.49) v1(27.94,110.49) v1(27.94,107.95) v1(27.94,95.89) v1(27.94,93.98) v1(27.94,84.71) v1(27.98,101.21) v1(28.3,102.49) v1(28.51,87.69) v1(28.57,83.19) v1(28.96,85.72) v1(29.21,106.05) v1(29.21,88.9) v1(29.46,108.84) v1(29.46,84.2) v1(29.59,101.22) v1(29.72,99.31) v1(29.72,97.03) v1(29.72,91.31) v1(29.84,110.49) v1(29.91,86.7) v1(29.97,124.49) v1(30.48,107.31) v1(30.48,106.05) v1(30.73,83.57) v1(31.04,87.84) v1(31.11,111.76) v1(31.11,100.33) v1(31.11,98.68) v1(31.37,89.15) v1(31.62,56.54) v1(31.62,55.65) v1(31.75,108.58) v1(31.88,96.9) v1(32.38,107.31) v1(32.38,106.05) v1(32.38,99.06) v1(32.38,81.92) v1(32.38,80.64) v1(32.38,78.74) v1(32.38,77.47) v1(32.38,76.2) v1(32.38,74.93) v1(32.38,73.66) v1(32.38,71.12) v1(32.38,69.85) v1(32.51,124.49) v1(33,95.27) v1(33,94) v1(33.02,92.71) v1(33,91.46) v1(33.02,90.17) v1(33.66,109.22) v1(34.29,115.57) v1(34.29,114.3) v1(34.29,107.95) v1(34.29,106.05) v1(34.29,95.25) v1(34.29,93.98) v1(34.29,92.71) v1(34.29,91.44) v1(34.29,90.17) v1(34.29,71.12) v1(34.29,69.85) v1(35.05,124.49) v1(35.56,95.25) v1(35.56,93.98) v1(35.56,92.71) v1(35.56,91.44) v1(35.56,90.17) v1(36.2,106.05) v1(36.83,95.25) v1(36.83,93.98) v1(36.83,92.71) v1(36.83,91.44) v1(36.83,90.17) v1(37.59,124.49) v1(38.1,111.76) v1(38.1,108.58) v1(38.1,106.05) v1(38.1,95.25) v1(38.1,93.98) v1(38.1,92.71) v1(38.1,91.44) v1(38.1,90.17) v1(39.37,114.3) v1(39.37,99.06) v1(39.37,88.9) v1(40.01,107.95) v1(40.01,106.05) v1(40.01,96.52) v1(40.13,124.49) v1(40.89,88.01) v1(41.27,110.49) v1(41.27,96.52) v1(41.91,107.95) v1(41.91,106.05) v1(41.91,101.6) v1(41.91,99.06) v1(42.55,114.3) v1(42.55,111.76) v1(42.55,96.52) v1(42.67,124.49) v1(43.18,109.86) v1(43.81,108.58) v1(43.81,104.78) v1(43.81,102.87) v1(43.81,99.06) v1(43.81,96.52) v1(44.45,114.3) v1(44.45,111.76) v1(45.09,108.58) v1(45.09,101.6) v1(45.09,96.52) v1(45.09,92.71) v1(45.21,124.49) v1(45.72,104.14) v1(46.35,114.3) v1(46.35,101.6) v1(46.35,97.79) v1(46.35,92.71) v1(46.35,91.44) v1(46.43,72.19) v1(47.29,72.19) v1(47.62,120.02) v1(47.62,92.71) v1(47.62,91.44) v1(47.75,124.49) v1(48.26,110.49) v1(48.26,104.14) v1(48.26,99.69) v1(48.9,120.02) v1(49.53,116.78) v1(50.16,104.78) v1(50.16,92.71) v1(50.29,124.49) v1(50.8,102.23) v1(52.07,116.84) v1(52.07,114.3) v1(52.07,107.95) v1(52.7,89.53) v1(52.83,124.49) v1(53.34,104.78) v1(53.34,73.03) v1(53.34,71.75) v1(54.61,73.03) v1(54.61,71.75) v1(55.37,124.49) v1(55.88,114.3) v1(55.88,113.03) v1(55.88,111.12) v1(55.88,106.68) v1(56.52,120.65) v1(57.91,124.49) v1(58.42,111.12) v1(58.42,107.31) v1(59.05,116.84) v1(59.66,120.27) v1(60.45,124.49) v1(60.93,120.27) v1(60.96,114.3) v1(60.96,113.03) v1(60.96,111.12) v1(62.23,107.31) v1(62.99,124.49) v1(64.14,111.12) v1(64.77,119.38) v1(66.04,124.46) v1(66.04,119.38) v1(66.04,116.84) v1(66.04,107.31) v1(66.42,93.09) v1(66.42,92.2) v1(67.31,93.09) v1(67.94,111.12) v1(68.58,113.03) v1(69.22,124.46) v1(69.85,118.11) v1(69.85,107.31) v1(69.85,105.41) v1(69.85,104.14) v1(70.48,113.03) v1(71.12,111.12) v1(72.39,124.46) v1(72.39,118.11) v1(72.39,113.03) v1(73.66,113.03) v1(73.66,111.29) v1(74.93,124.46) v1(74.93,118.24) v1(74.93,113.03) v1(76.53,72.87) v1(76.53,71.98) v1(77.42,72.87) v1(77.42,71.98) v1(78.31,72.87) v1(78.31,71.98) v1(79.2,72.87) v1(79.2,71.98) v1(111.82,78.05) v1(111.76,76.83) v1(111.76,75.56) v1(113.03,78.11) v1(113.03,76.83) v1(113.03,75.56) v1(114.3,78.11) v1(114.3,76.83) v1(114.3,75.56) v1(118.75,78.11) v1(118.75,76.83) v1(118.75,75.56) v1(120.02,78.11) v1(120.02,76.83) v1(120.02,75.56) v1(121.28,78.11) v1(121.28,76.83) v1(121.28,75.56) v1(127,78.11) v1(127,76.83) v1(127,75.56) v1(128.27,78.11) v1(128.27,76.83) v1(128.27,75.56) v1(129.54,78.11) v1(129.54,76.83) v1(129.54,75.56) v1(130.81,78.11) v1(130.81,76.83) v1(130.81,75.56)
A: length 4.1
  TOP w0.508: R515.2 J505.3
ACMP1IN_N3: length 8.9
  TOP w0.254: U501.8 36.31,87.34 38.07,85.57 39.65,85.57 40.26,84.96 40.26,83.88 C511.2 39.88,83.5 R637.2
ACMP1IN_P3: length 9
  TOP w0.254: U501.9 36.81,87.57 38.23,86.16 39.83,86.16 40.77,85.22 40.77,84.01 C512.2 41.15,83.5 R634.2
ACMP1OUT: length 4.5
  TOP w0.254: C510.2 37.15,85.41 TP601.1 35.81,86.75 U501.7
APT0_A: length 16.2
  TOP w0.203: R601.1 51.55,93.33 42.48,93.33 42.11,92.96 U501.19
APT0_B: length 17
  TOP w0.203: U501.23 41.44,94.96 41.86,95.38 47.24,95.38 52.1,100.23 R604.1
APT1_A: length 15.6
  TOP w0.203: R602.1 53.19,92.61 51.74,94.06 42.32,94.06 41.72,93.46 U501.20
APT1_B: length 18.3
  TOP w0.203: R605.1 46.48,95.91 41.61,95.91 41.15,95.46 U501.24
APT2_A: length 15.8
  TOP w0.203: R603.1 49.61,96.42 47.98,94.79 42.16,94.79 41.33,93.96 U501.21
APT2_B: length 21.5
  TOP w0.203: U501.25 38.31,98.22 38.51,98.42 45.19,98.42 R606.1
B: length 4.1
  TOP w0.508: R514.2 J505.2
BOOT: length 26.7
  TOP w0.203: U501.42 24.89,92.96 24.23,92.3 13.74,92.3 13.21,92.84 9.63,92.84 9.42,92.63 R526.1 5.71,92.08
BUS: length 6.8
  TOP w1.016: U16.1 106.05,86.25 R14.1
  vias: v1(76.12,48.06) v1(76.12,47.17) v1(76.12,46.28) v1(77.01,48.06) v1(77.01,47.17) v1(77.01,46.28) v1(77.9,48.06) v1(77.9,47.17) v1(77.9,46.28)
BUS_V_SAMP: length 7.8
  TOP w0.254: U501.14 41.14,90.46 41.36,90.23 C5.1 47.46,90.23 R7.2
CAPM0_QDMZ: length 22.6
  TOP w0.203: v1(30.48,102.23) C513.1 31.3,103.44 31.5,103.24 31.5,102.13 34.31,99.32 U501.33 ; R513.1 R518.1 v1(26.67,110.49)
  BOTTOM w0.203: v1(26.67,110.49) 29.9,107.26 29.9,102.82 v1(30.48,102.23)
CAPM1_QDMB: length 28.7
  TOP w0.203: v1(32.38,102.23) C514.1 33.06,103.44 33.27,103.24 33.27,101.24 34.81,99.69 U501.32 ; v1(22.86,110.49) R517.1 R514.1
  BOTTOM w0.203: v1(22.86,110.49) 23.93,111.56 27.79,111.56 31.75,107.59 31.75,102.87 v1(32.38,102.23)
CAPM2_QDMA: length 35.1
  TOP w0.203: v1(19.05,110.49) R516.1 R515.1 ; U501.31 35.31,103.24 35.11,103.44 C515.1 v1(34.29,102.23)
  BOTTOM w0.203: v1(19.05,110.49) 21.29,112.73 28.88,112.73 33.66,107.95 33.66,102.87 v1(34.29,102.23)
HIN_U_C: length 34.8
  TOP w0.203: R601.2 R607.2 55.92,88.84 C601.1 58.86,90.55 77.11,90.55 78.75,88.91 U16.23
HIN_V_C: length 39.8
  TOP w0.203: U16.18 87.85,98.15 78.89,98.15 76.66,100.38 70.43,100.38 69.72,101.09 60.45,101.09 58.17,98.81 58.17,95.06 C602.1 55.92,94.04 R608.2 R602.2
HIN_W_C: length 41.9
  TOP w0.203: v1(57.15,99.06) C603.1 55.92,97.85 R609.2 R603.2 ; v1(58.42,108.58) 59.18,109.35 77.09,109.35 78.49,107.95 82.78,107.95 83.61,107.11 U16.13
  BOTTOM w0.203: v1(58.42,108.58) 57.15,107.31 v1(57.15,99.06)
I2C0_SCL: length 45.8
  TOP w0.203: U501.15 41.53,90.96 41.68,90.81 42.55,90.81 v1(43.18,91.44) ; J504.3 R512.1 9.42,83.29 v1(9.53,83.19)
  BOTTOM w0.203: v1(43.18,91.44) 38.89,87.15 31.22,87.15 27.25,83.19 v1(9.53,83.19)
I2C0_SDA: length 41.9
  TOP w0.203: v1(41.91,91.46) U501.16 ; 5.71,87 R511.1 9.42,85.83 v1(9.53,85.72)
  BOTTOM w0.203: v1(41.91,91.46) 40.48,91.46 37.52,88.49 30.78,88.49 28.65,86.36 10.16,86.36 v1(9.53,85.72)
IPM_CSC: length 15.5
  TOP w0.203: U16.10 86.79,112.2 86.79,112.73 85.81,113.7 83.62,113.7 81.69,115.63 C618.1 79.15,115.63 78.94,115.84 R619.1 80.26,117.98 R618.1
IPM_I: length 5.4
  TOP w0.254: R638.2 R639.2 R636.2 C625.1 38.52,80.8 R637.1
IPM_NU: length 50.1
  TOP w0.254: R632.1 115.54,74.04 115.54,82.81 114.99,83.36 113.28,83.36 113.03,83.62 R615.2
  TOP w0.508: R645.2 v1(86.23,117.47)
  BOTTOM w0.508: U16.3 101.39,94.11 91.31,104.19 91.31,107.34 89.53,109.12 89.53,114.17 v1(86.23,117.47)
IPM_NU_1: length 89.6
  TOP w0.203: v1(49,84.89) R631.1 ; R639.1 v1(39.88,77.11)
  TOP w0.254: R632.2 115.42,71.89 115.42,71.36 114.88,70.81 73.53,70.81 66.32,78.03 58.57,78.03 50.11,86.49 49.38,86.49 R631.1
  BOTTOM w0.203: v1(49,84.89) 49,83.67 42.44,77.11 v1(39.88,77.11)
IPM_NV: length 43.6
  TOP w0.254: R10.1 122.78,82.79 122.08,83.49 120.27,83.49 120.02,83.74 R616.2
  TOP w0.508: R644.2 v1(87.5,117.47)
  BOTTOM w0.508: U16.5 98.44,101.91 90.55,109.8 90.55,114.43 v1(87.5,117.47)
IPM_NV_1: length 86.1
  TOP w0.254: R638.1 42.52,76.71 65.95,76.71 72.89,69.77 120.27,69.77 R10.2
IPM_NW: length 40.4
  TOP w0.254: R617.2 128.27,83.71 128.02,83.45 126,83.45 125.45,82.9 125.45,74.12 R625.1
  TOP w0.508: v1(89.89,118.9) 89.48,118.49 R641.2
  BOTTOM w0.508: v1(89.89,118.9) 92.28,121.28 104.52,121.28 105.98,119.83 U16.7
IPM_NW_1: length 98.3
  TOP w0.254: 38.33,75.49 35.75,75.49 R624.1 ; 38.33,75.49 38.48,75.64 R636.1 ; 38.33,75.49 65.74,75.49 72.35,68.88 122.76,68.88 125.43,71.55 125.43,71.96 R625.2
IPM_U: length 37.9
  TOP w0.381: C114.2 77.32,85.36 78.41,84.28 C100.2 81.23,83.57 89.03,83.57 90.32,84.86 90.32,88.67 92.96,91.31 101.85,91.31 102.95,90.21 U16.2
IPM_V: length 33.8
  TOP w0.381: C113.2 77.34,94.89 77.65,95.2 C101.2 81.8,95.2 82.19,95.59 85.76,95.59 87.22,94.13 99.34,94.13 103.22,98.01 U16.4
IPM_VFO: length 35.7
  TOP w0.203: R613.1 R614.1 C152.2 81.78,114.24 83.7,112.31 U16.9
  BOTTOM w0.203: U16.9 83.31,112.31 82.61,111.62 82.61,101.78 ; U16.15 82.75,101.91 82.61,101.78 ; 82.61,101.78 82.61,93.23 83.03,92.81 U16.20
IPM_W: length 35
  TOP w0.381: C115.2 78.08,104.41 78.52,104.85 C102.2 80.57,104.9 82.04,104.9 82.78,104.17 86.44,104.17 87.48,103.12 97.54,103.12 104.13,109.71 U16.6
JTAG_TCK/SWDCLK: length 27.4
  TOP w0.203: R503.1 12.4,105.18 12.4,103.58 13.82,102.16 27.76,102.16 30.4,99.52 31.17,99.52 32.81,97.87 U501.36
JTAG_TMS/SWDIO: length 24.6
  TOP w0.203: U501.37 30.37,95.46 29.01,96.82 29.01,99.47 27.38,101.09 13.16,101.09 12.4,100.33 R504.1
KEY0: length 11.3
  TOP w0.203: R524.2 R520.1 27.98,103.44 C517.1 29.21,102.49 30.7,101 31.65,101 33.31,99.34 U501.35
LED0: length 16.8
  TOP w0.203: U501.47 30.36,90.46 29.87,89.97 29.87,88.21 26.75,85.09 20.44,85.09 D501.2
LED1: length 16.1
  TOP w0.203: D503.2 26.8,84.45 30.37,88.03 30.37,89.76 30.57,89.96 U501.48
LIN_U_C: length 41.6
  TOP w0.203: U16.22 82.77,90.21 82.35,89.79 78.89,89.79 77.5,91.19 58.67,91.19 v1(58.42,91.44) ; R604.2 R612.2 57.11,101.7 C604.1 v1(58.17,101.66)
  BOTTOM w0.203: v1(58.17,101.66) 58.17,91.69 v1(58.42,91.44)
LIN_V_C: length 33.7
  TOP w0.203: R605.2 R611.2 55.92,105.47 C605.1 66.36,105.47 70.56,101.27 76.53,101.27 79.07,98.73 82.98,98.73 83.57,99.31 U16.17
LIN_W_C: length 34.3
  TOP w0.203: U16.12 78.78,108.41 77.22,109.98 57.85,109.98 C606.1 55.92,109.28 R610.2 R606.2
PGA0IN_N0: length 11.2
  TOP w0.254: R623.2 33.91,78.24 33.91,82.83 R620.1 34.29,83.21 34.29,84.14 C620.1 34.31,84.79 U501.4
PGA0IN_P0: length 12.2
  TOP w0.254: U501.5 34.81,83.36 C621.2 34.48,81.92 34.48,81.56 R621.2 34.42,80.68 34.42,79.84 R622.1 34.42,78.91 34.42,78.3 R624.2
PGA0OUT: length 6.3
  TOP w0.254: R620.2 32.94,83.34 32.94,84.09 C620.2 32.89,84.77 32.89,85.45 33.81,86.36 U501.3
PGA1IN_N0: length 11
  TOP w0.254: U501.12 38.31,87.55 38.69,87.17 42.15,87.17 C622.1 42.94,87.17 43.59,87.17 R627.1 44.3,87.17 47.32,87.17 R630.2
PGA1IN_P0: length 12.5
  TOP w0.254: R631.2 46.96,86.66 46.49,86.66 R629.1 45.45,86.66 44.72,86.66 R628.2 43.68,86.66 42.91,86.66 C623.2 42.18,86.66 38.46,86.66 37.81,87.31 U501.11
PGA1OUT: length 4.5
  TOP w0.254: R627.2 42.58,89 C622.2 41.72,88.96 40.72,89.96 U501.13
POE_ADC: length 71.3
  TOP w0.203: v1(45.72,102.87) 54.99,112.14 77.09,112.14 77.28,112.33 C617.2 78.41,112.97 R614.2 ; v1(30.76,84.86) R509.2
  TOP w0.254: U501.1 32.81,87.52 31.98,86.69 31.6,86.69 R509.2
  BOTTOM w0.203: v1(30.76,84.86) 31.98,86.08 40.31,86.08 45.72,91.49 v1(45.72,102.87)
PTC_RELAY: length 71
  TOP w0.203: v1(1.37,93.6) 1.55,93.42 1.55,64.49 8.26,57.78 R401.2 ; U501.41 24.6,93.46 23.93,92.79 14.02,92.79 13.46,93.34 v1(7.62,93.34)
  BOTTOM w0.203: v1(1.37,93.6) 7.37,93.6 v1(7.62,93.34)
RESET: length 5.5
  TOP w0.203: R525.1 26.71,97.09 C518.1 30.07,94.96 U501.38
SPI0_CLK: length 23.3
  TOP w0.203: U501.27 37.31,98.84 C521.1 42.47,103.44 42.67,103.64 42.67,108.46 45.09,110.87 R537.1
SPI0_CS: length 20.7
  TOP w0.203: U501.30 35.81,100.68 36.2,101.07 C522.1 36.77,103.44 37.08,103.76 37.08,116.48 R536.1
SPI0_RXD: length 23.1
  TOP w0.203: R538.1 43.81,111.89 41.02,109.09 41.02,103.76 40.7,103.44 C520.1 40.01,102.51 36.81,99.32 U501.28
SPI0_TXD: length 22
  TOP w0.203: R535.1 40.64,112.65 38.99,111 38.99,103.64 38.79,103.44 C523.1 38.1,102.11 36.31,100.32 U501.29
UART3_RX: length 35.5
  TOP w0.203: R505.2 R528.1 55.63,116.74 46.2,107.31 v1(45.09,107.31) ; v1(43.18,92.71) 42.93,92.46 U501.18
  BOTTOM w0.203: v1(45.09,107.31) 43.18,105.41 v1(43.18,92.71)
UART3_TX: length 46.7
  TOP w0.203: v1(44.45,91.44) 43.87,92.02 41.03,92.02 40.97,91.96 U501.17 ; v1(45.09,105.41) 45.09,105.46 55.58,115.95 67.16,115.95 R506.2
  BOTTOM w0.203: v1(45.09,105.41) 44.45,104.78 v1(44.45,91.44)
VB_U_C: length 14.9
  TOP w0.381: C114.1 76.73,87.86 78.69,85.9 C100.1 81.46,85.9 82.83,84.53 85.88,84.53 86.36,85.01 U16.25
VB_V_C: length 14.1
  TOP w0.381: C113.1 76.93,97.39 77.5,96.82 C101.1 81.61,96.82 82.21,96.23 86.04,96.23 86.86,95.41 U16.19
VB_W_C: length 14.3
  TOP w0.381: C115.1 77.29,106.91 77.73,106.48 C102.1 81.48,106.48 83.16,104.8 87.69,104.8 U16.14
XTAL_IN: length 8
  TOP w0.254: R530.2 28.45,94.61 29.1,93.96 U501.40
XTAL_OUT: length 8.3
  TOP w0.254: R529.2 24.77,95.86 25.37,95.25 28.7,95.25 29.49,94.46 U501.39
Z: length 4.1
  TOP w0.508: R513.2 J505.1
$1N6939: length 98.1
  TOP w0.254: R626.2 125.93,71.86 125.93,71.34 122.97,68.38 72.14,68.38 65.53,74.98 34.86,74.98 R623.1
$1N12806: length 73.5
  TOP w0.254: R633.2 114.91,71.94 114.91,71.58 114.65,71.32 73.74,71.32 66.53,78.54 58.78,78.54 50.32,87 49.38,87 R630.1
$1N14808: length 4.2
  TOP w0.254: 43.8,80.84 R640.1 ; 43.8,80.84 45.33,80.84 R635.2 ; 43.8,80.84 C624.1 42.51,80.8 R634.1
$1N20473: length 8
  TOP w0.508: R641.1 R644.1 R645.1 R618.2
$9N1662: length 3.9
  TOP w0.203: Q401.1 11.79,59.44 R402.2 R401.1
$9N4169: length 2.4
  TOP w0.762: R4.1 R5.2
$9N4173: length 2.5
  TOP w0.762: R14.2 R5.1
$9N4175: length 53.1
  TOP w0.508: R4.2 91.31,76.83 88.14,80.01 59.82,80.01 D2.3 49.5,88.39 R6.2 R7.1
$9N4195: length 3.9
  TOP w0.305: R8.1 24.64,78.13 22.99,78.13 R9.2 22.96,77.9 22.46,77.4 U1.3
$9N10787: length 3.7
  TOP w0.305: 12.42,71.75 12.3,71.63 U3.3 ; 12.42,71.75 R13.2 ; 12.42,71.75 R12.1
$10N6803: length 3.4
  TOP w0.254: R529.1 24.73,98.49 C502.2 23.33,98.65 X501.1
$10N6848: length 6.3
  TOP w0.203: R501.1 R504.2 9.46,100.29 C505.2 J501.5
$10N6869: length 6.3
  TOP w0.203: R503.2 R502.2 9.46,107.99 C504.2 J501.1
$10N6873: length 4.6
  TOP w0.254: X501.3 20.38,95.69 C501.2 R530.1
$10N10026: length 3.7
  TOP w0.203: R505.1 J502.1
$10N10027: length 3.7
  TOP w0.203: R506.1 J502.5
$10N10077: length 9
  TOP w0.254: v1(29.46,90.3) 29.59,90.3 30.25,90.96 U501.46
  TOP w0.508: R510.2 25.15,89.99 C506.2 25.9,90.74 C507.2 v1(27.18,89.92)
  BOTTOM w0.508: v1(27.18,89.92) 29.08,89.92 v1(29.46,90.3)
$10N13362: length 16.8
  TOP w0.508: v1(26.67,114.3) R518.2 ; v1(19.05,114.3) R516.2 ; R517.2 v1(22.86,114.3)
  BOTTOM w0.508: v1(26.67,114.3) v1(22.86,114.3) v1(19.05,114.3) v1(13.34,114.3)
$10N14425: length 1.7
  TOP w0.508: R523.1 D502.1
$10N14426: length 1.7
  TOP w0.508: D501.1 R521.1
$10N14427: length 1.7
  TOP w0.508: D503.1 R522.1
$10N14428: length 12.3
  TOP w0.203: S501.3 S501.4 26.22,104.43 R524.1
$10N42642: length 5.5
  TOP w0.203: R535.2 R534.1 39.37,120.65 J503.6
$10N42643: length 5.8
  TOP w0.203: J503.4 45.09,120.02 R537.2 R532.1
$10N42644: length 10.1
  TOP w0.203: R533.1 R536.2 36.83,122.56 37.34,123.06 39.5,123.06 J503.5
$10N42647: length 10.5
  TOP w0.203: R538.2 R531.1 41.91,118.85 41.91,122.56 42.55,123.19 44.45,123.19 J503.3
$10N48085: length 3.7
  TOP w0.203: R527.2 J504.5
$10N52800: length 3
  TOP w0.254: U501.2 33.31,86.93 R509.1

## Copper pours and planes (outline as drawn; the poured copper is in the pictures)
3V3 on TOP (solid shape): 76.2,116.2 76.2,114.01 76.07,113.88 72.29,113.88 72.05,114.12 72.05,116.04 72.36,116.36 76.05,116.36
3V3 on TOP (solid shape): 35.92,115.6 35.92,113.46 28.19,105.74 26.44,105.74 26.37,105.82 26.37,106.45 26.75,106.83 28.14,106.83 34.9,113.59 34.9,115.39 35.33,115.82 35.69,115.82
3V3 on TOP (solid shape): 51.69,122.5 51.69,119.79 51.84,119.63 56.69,119.63 56.9,119.43 56.9,117.81 56.85,117.75 50.24,117.75 50.04,117.96 50.04,122.66 50.09,122.71 51.49,122.71
3V3 on TOP (solid shape): 7.59,104.19 7.6,104.19 7.95,103.84 11.23,103.84 11.61,103.45 12.67,102.39 12.67,101.42 12.67,101.35 12.5,101.17 11.73,101.17 11.66,101.24 11.66,102.11 11.43,102.34 8.74,102.34 7.07,102.34 6.28,103.12 5.31,103.12 4.98,103.46 4.98,104.67 5.18,104.88 6.91,104.88
3V3 on TOP (solid shape): 22.78,91.85 22.78,90.93 22.66,90.81 20.83,90.81 20.65,90.63 20.65,89.08 20.88,88.85 22.66,88.85 22.76,88.75 22.76,87.91 22.63,87.78 14.4,87.78 14.2,87.58 14.2,81.53 14.55,81.18 26.95,81.18 27.53,81.76 29.97,81.76 30.18,81.56 30.18,75.31 31.62,73.86 31.62,72.39 31.5,72.26 25.91,72.26 24.94,73.23 21.46,73.23 21.34,73.36 21.34,75.36 21.36,75.39 27.2,75.39 28.17,76.35 28.17,78.79 27.59,79.38 12.96,79.38 12.32,80.01 10.24,80.01 9.96,80.01 9.83,79.88 9.83,78.92 9.58,78.66 4.95,78.66 4.75,78.87 4.75,80.59 4.98,80.82 8.1,80.82 10.59,83.31 10.59,90.2 10.82,90.42 18.95,90.42 20.45,91.92 22.71,91.92
3V3 on BOTTOM (solid shape): 50.5,89.66 50.5,89.26 46.74,85.5 46.74,83.21 41.57,78.04 36.03,78.04 34.82,79.25 28.45,79.25 28.17,79.53 28.17,81.46 28.3,81.58 28.85,81.58 30.3,80.14 35.51,80.14 36.65,78.99 41.17,78.99 45.72,83.54 45.72,85.93 49.63,89.84 50.32,89.84
3V3 on BOTTOM (solid shape): 64.14,122.17 64.14,117.14 65.46,115.82 72.87,115.82 73.03,115.67 73.03,114.22 72.77,113.97 64.62,113.97 60.33,118.26 56.62,118.26 53.19,114.83 37.54,114.83 36.75,114.05 35.08,114.05 34.9,114.22 34.9,115.39 35.59,116.08 52.78,116.08 56.4,119.7 61.43,119.7 62.03,120.29 62.03,122.38 62.33,122.68 63.63,122.68
3V3 on BOTTOM (solid shape): 28.24,106.2 28.24,105.38 27.41,104.55 27.41,99.72 27.08,99.39 26.44,99.39 25.6,100.23 11.94,100.23 11.53,99.82 11.53,91.49 12.34,90.68 12.34,88.8 12.17,88.62 11,88.62 10.39,89.23 10.39,101.96 11.48,103.05 12.34,103.05 12.83,102.57 12.83,101.4 13.13,101.09 25.83,101.09 26.21,101.47 26.21,105.99 26.54,106.32 28.12,106.32
